# Altium PCB ip_phone_pcb.PcbDoc (part 1 of 4)
Units mil, origin at the board's own origin, x right, y up, seen from the top; angles counter-clockwise.
Board outline 2401.57 x 6885.83 mil, 6 copper layers (Component Side, Ground Plane, Inner Layer 1, Inner Layer 2, Power Plane, Solder Side), stack 60.4 mil thick; 371 components, 298 nets, 1249 pads, 735 vias.
Unrouted connection lines stored in the file: 81.
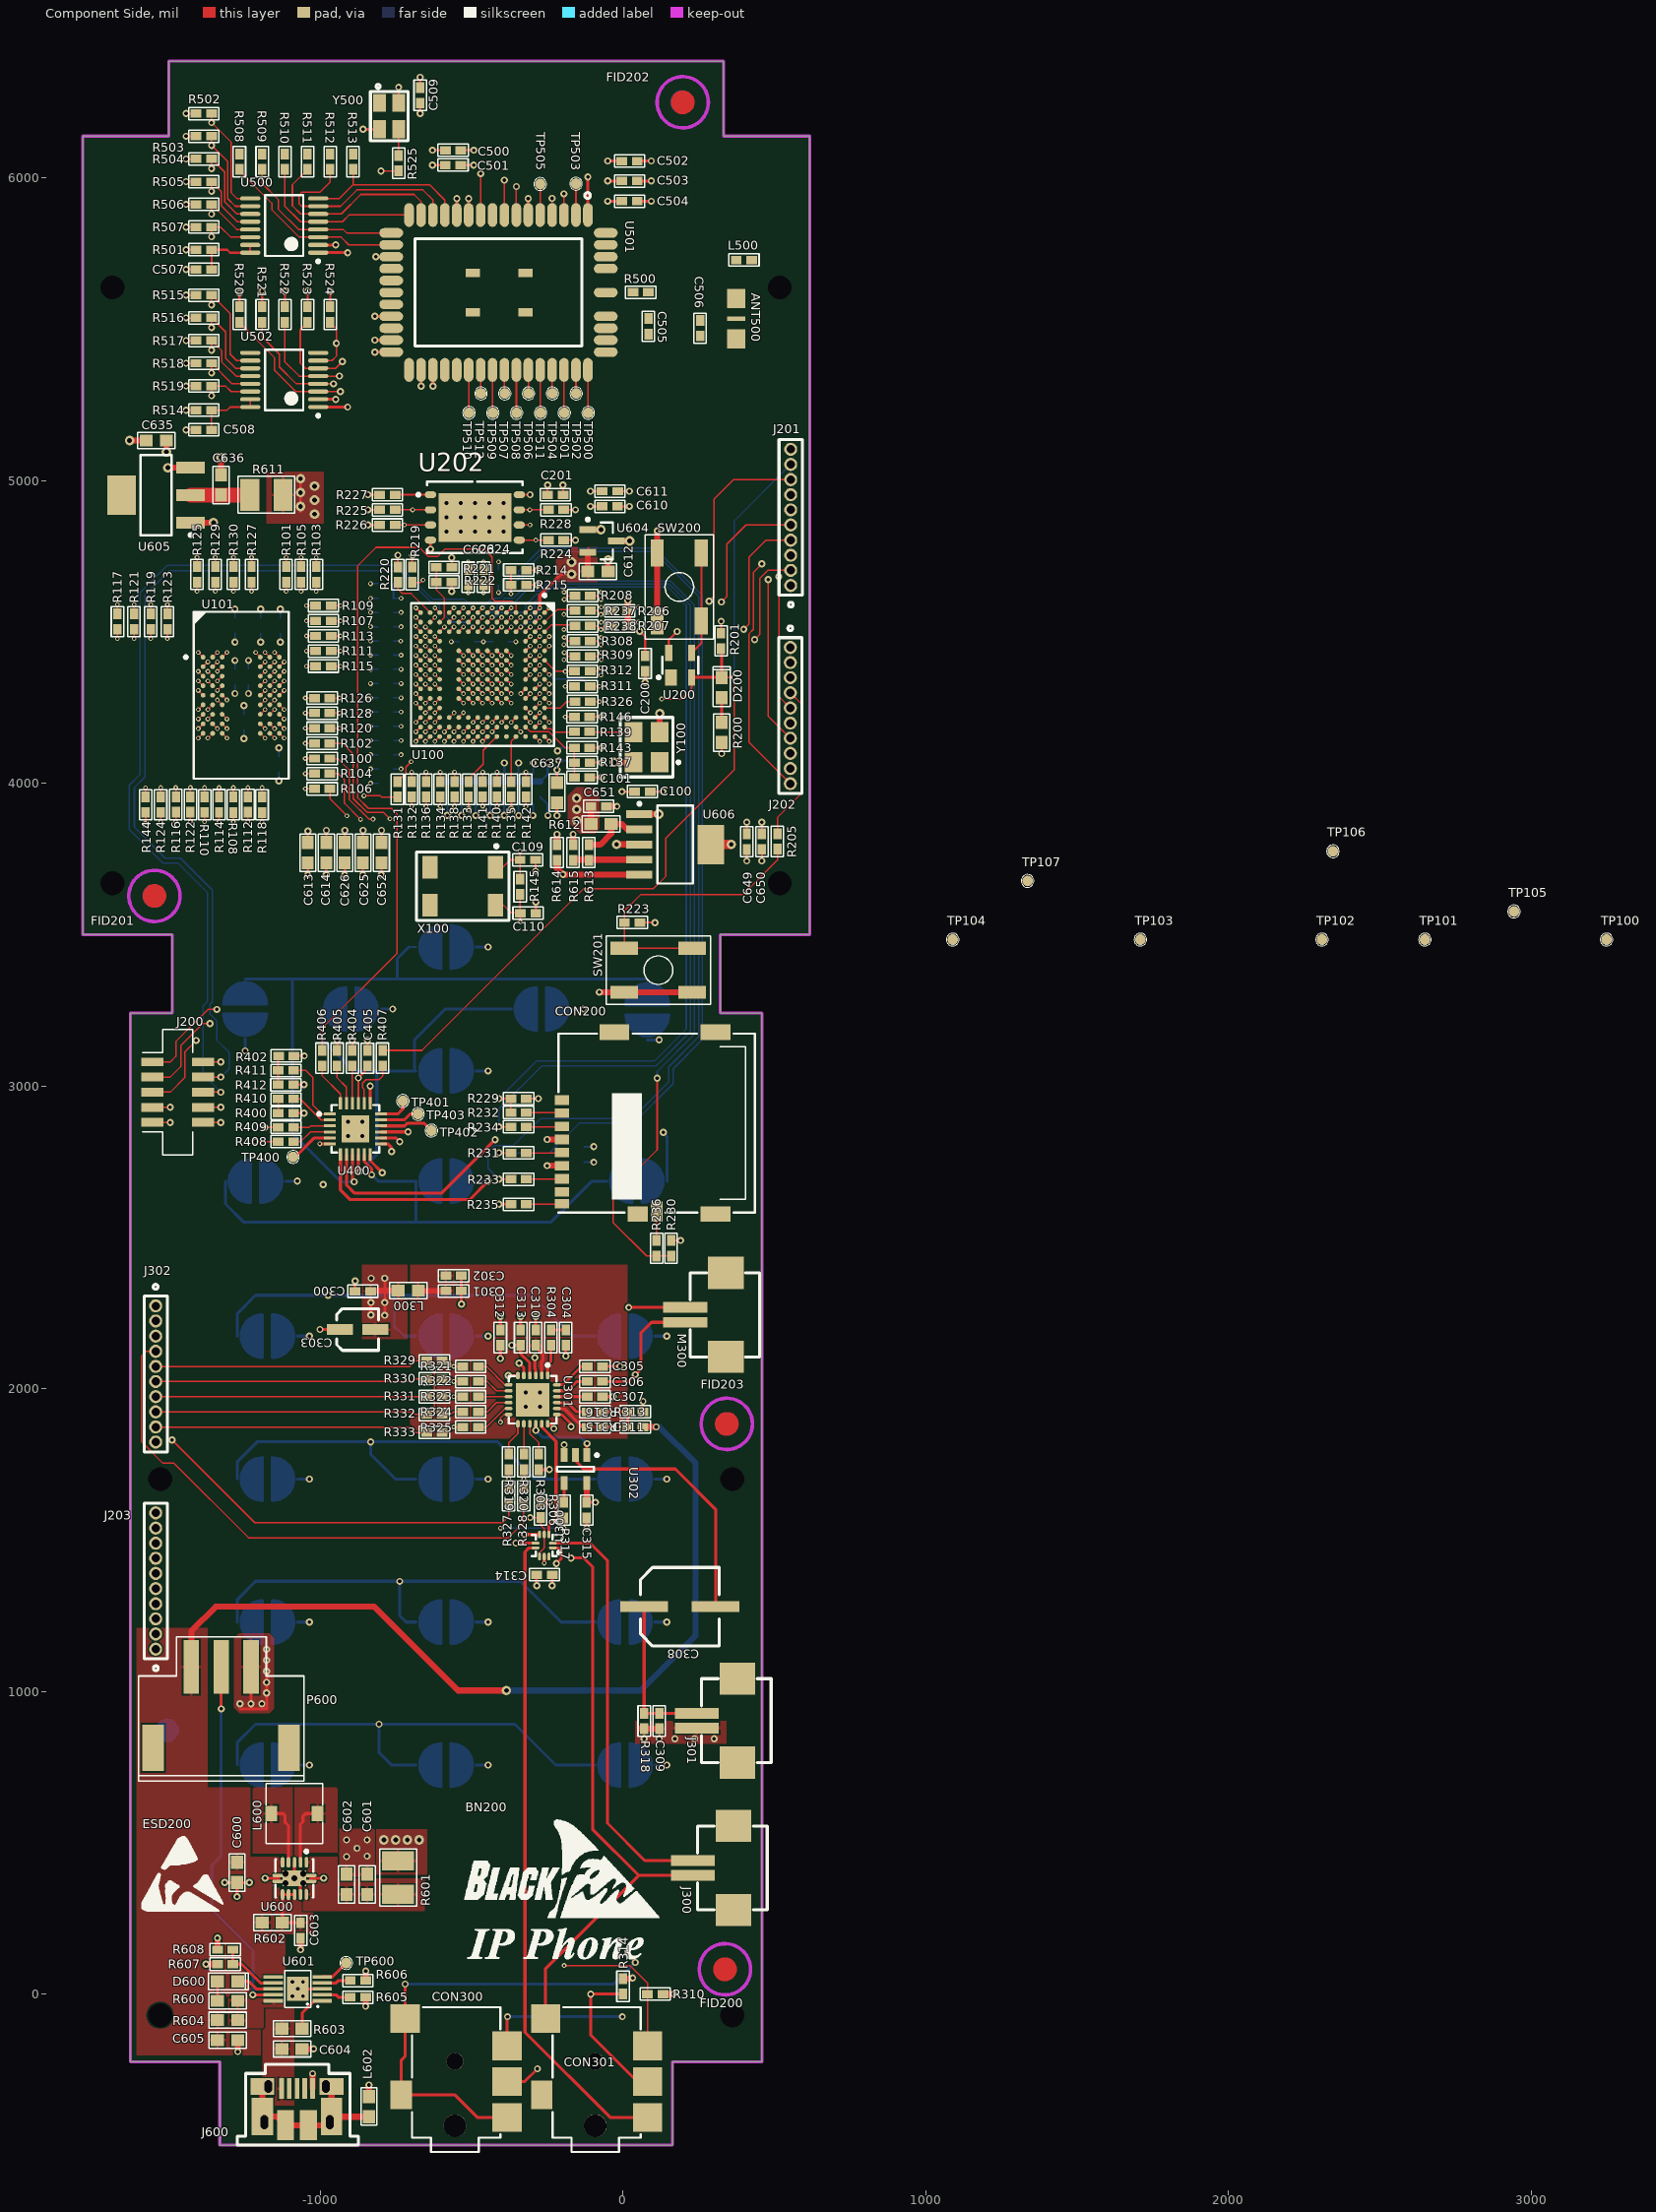
[diagram p0: Component Side view]
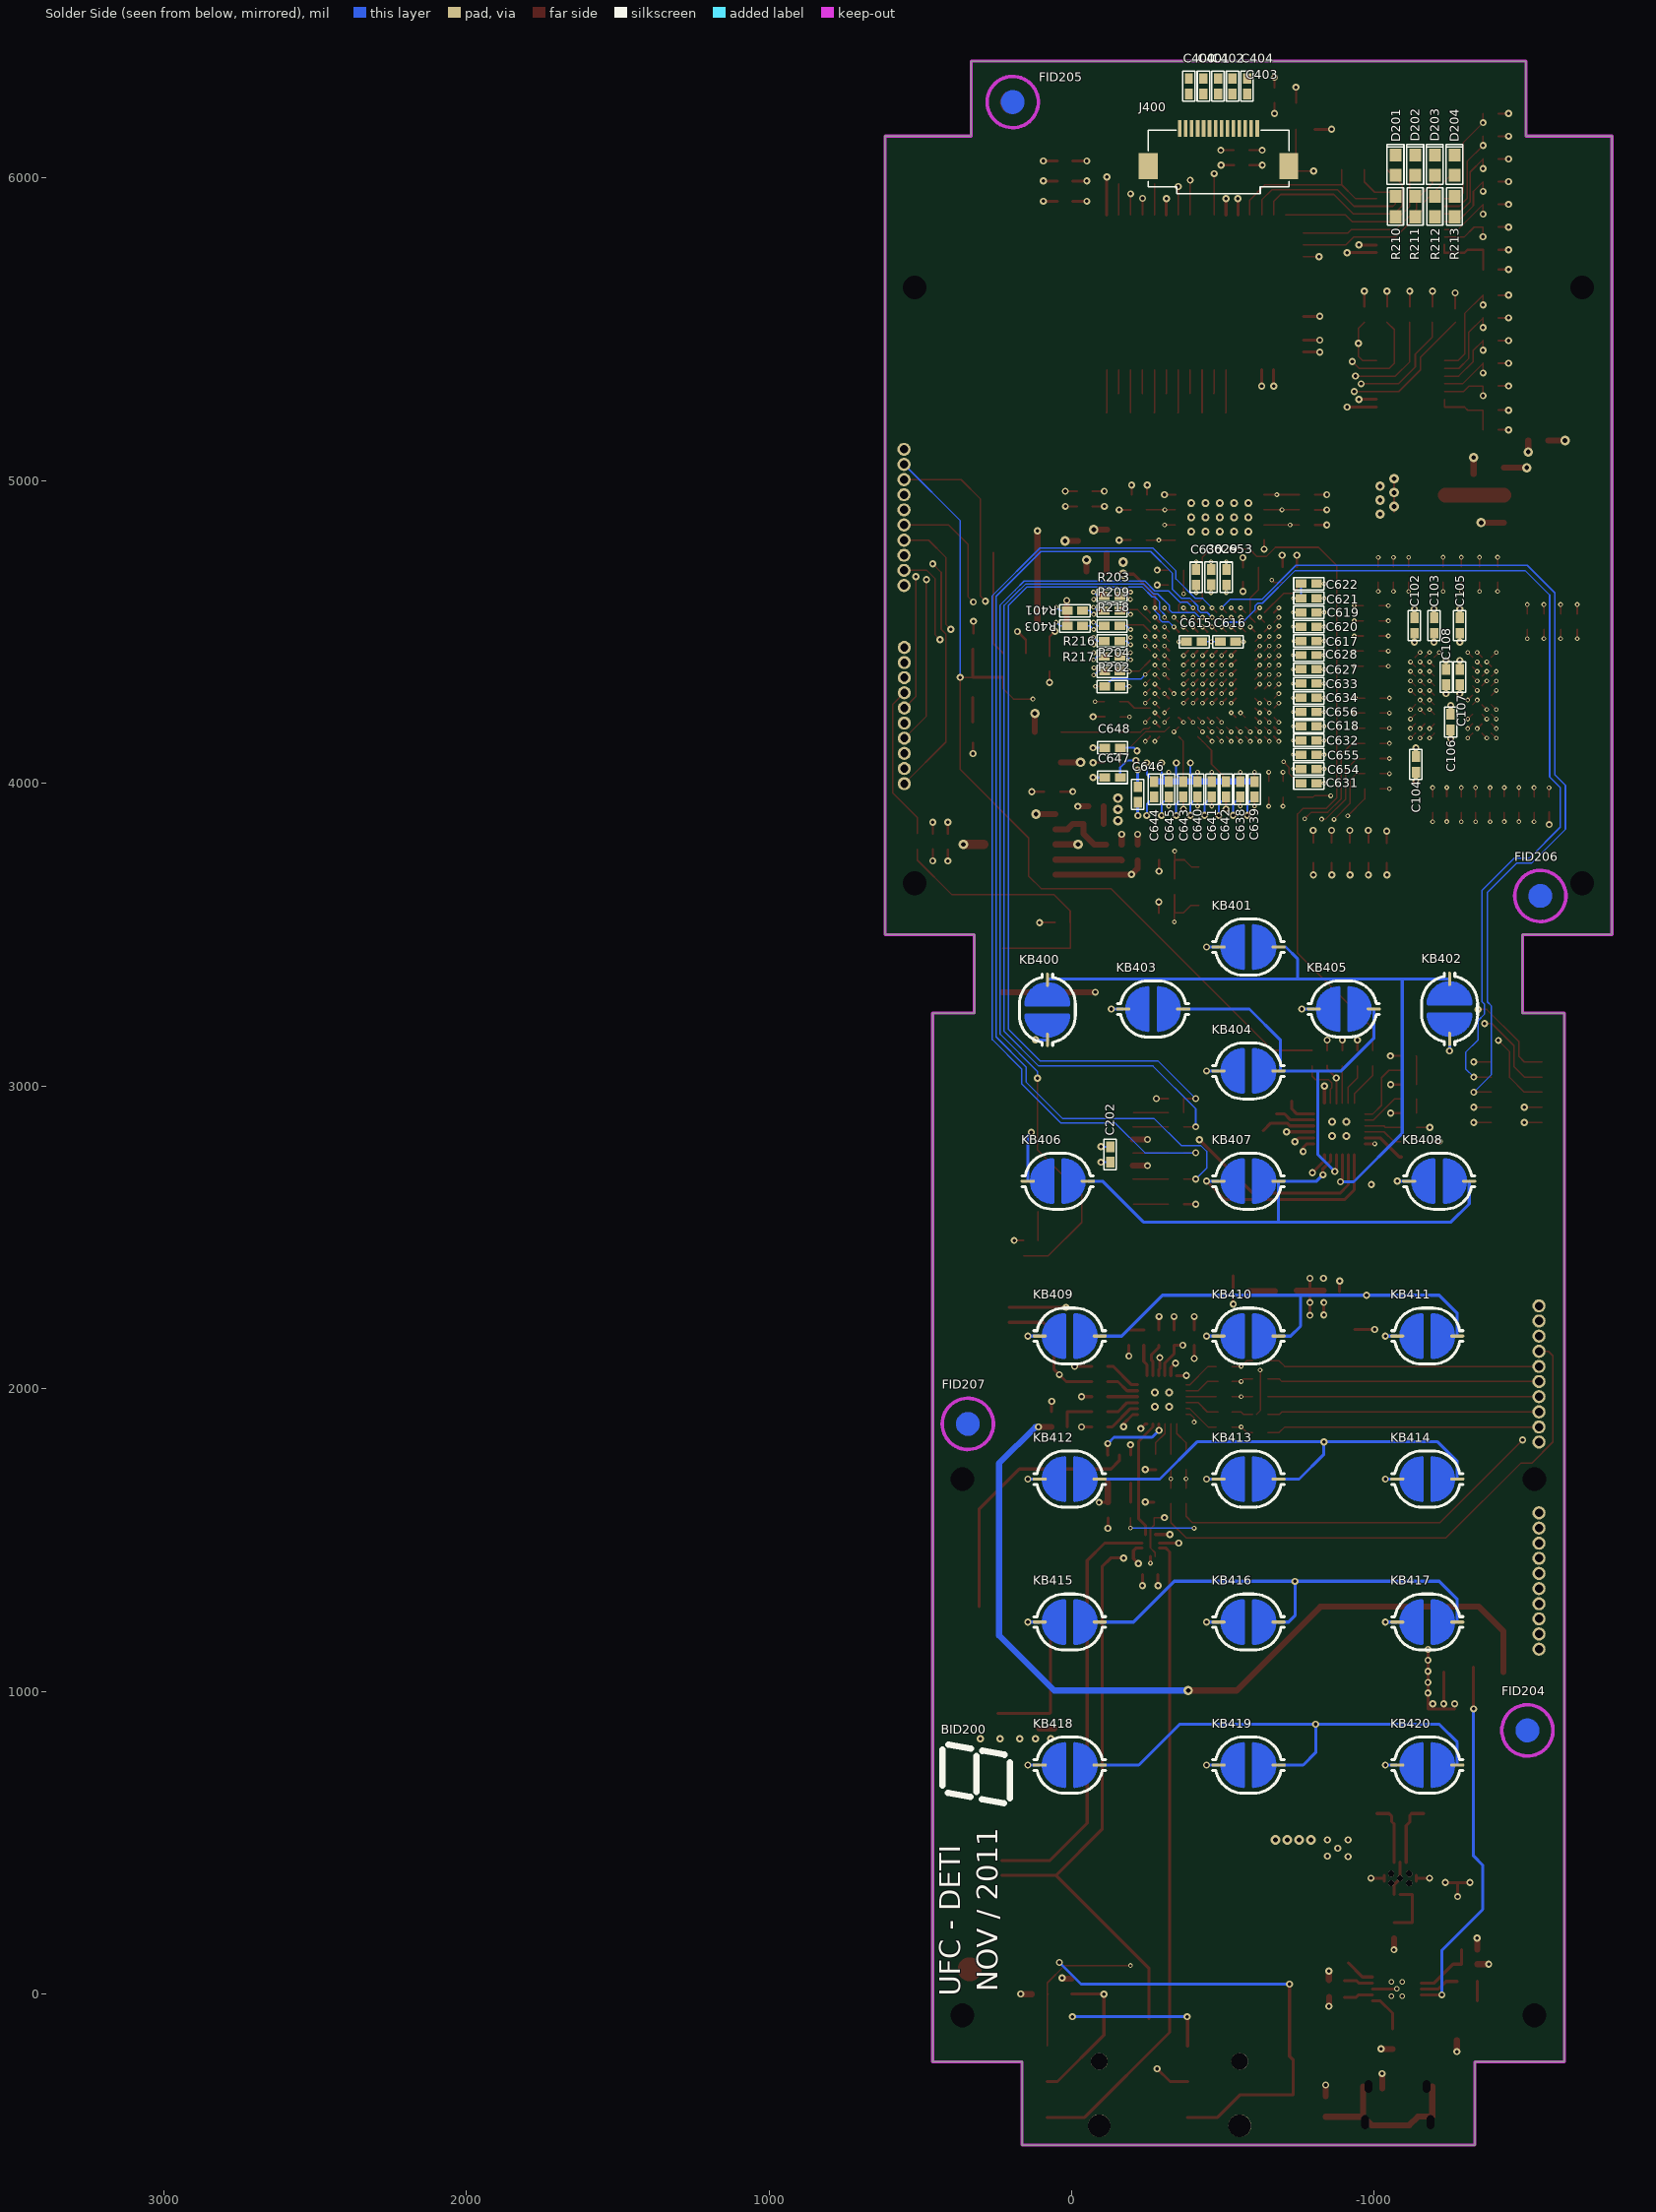
[diagram p1: Solder Side view, seen from below]
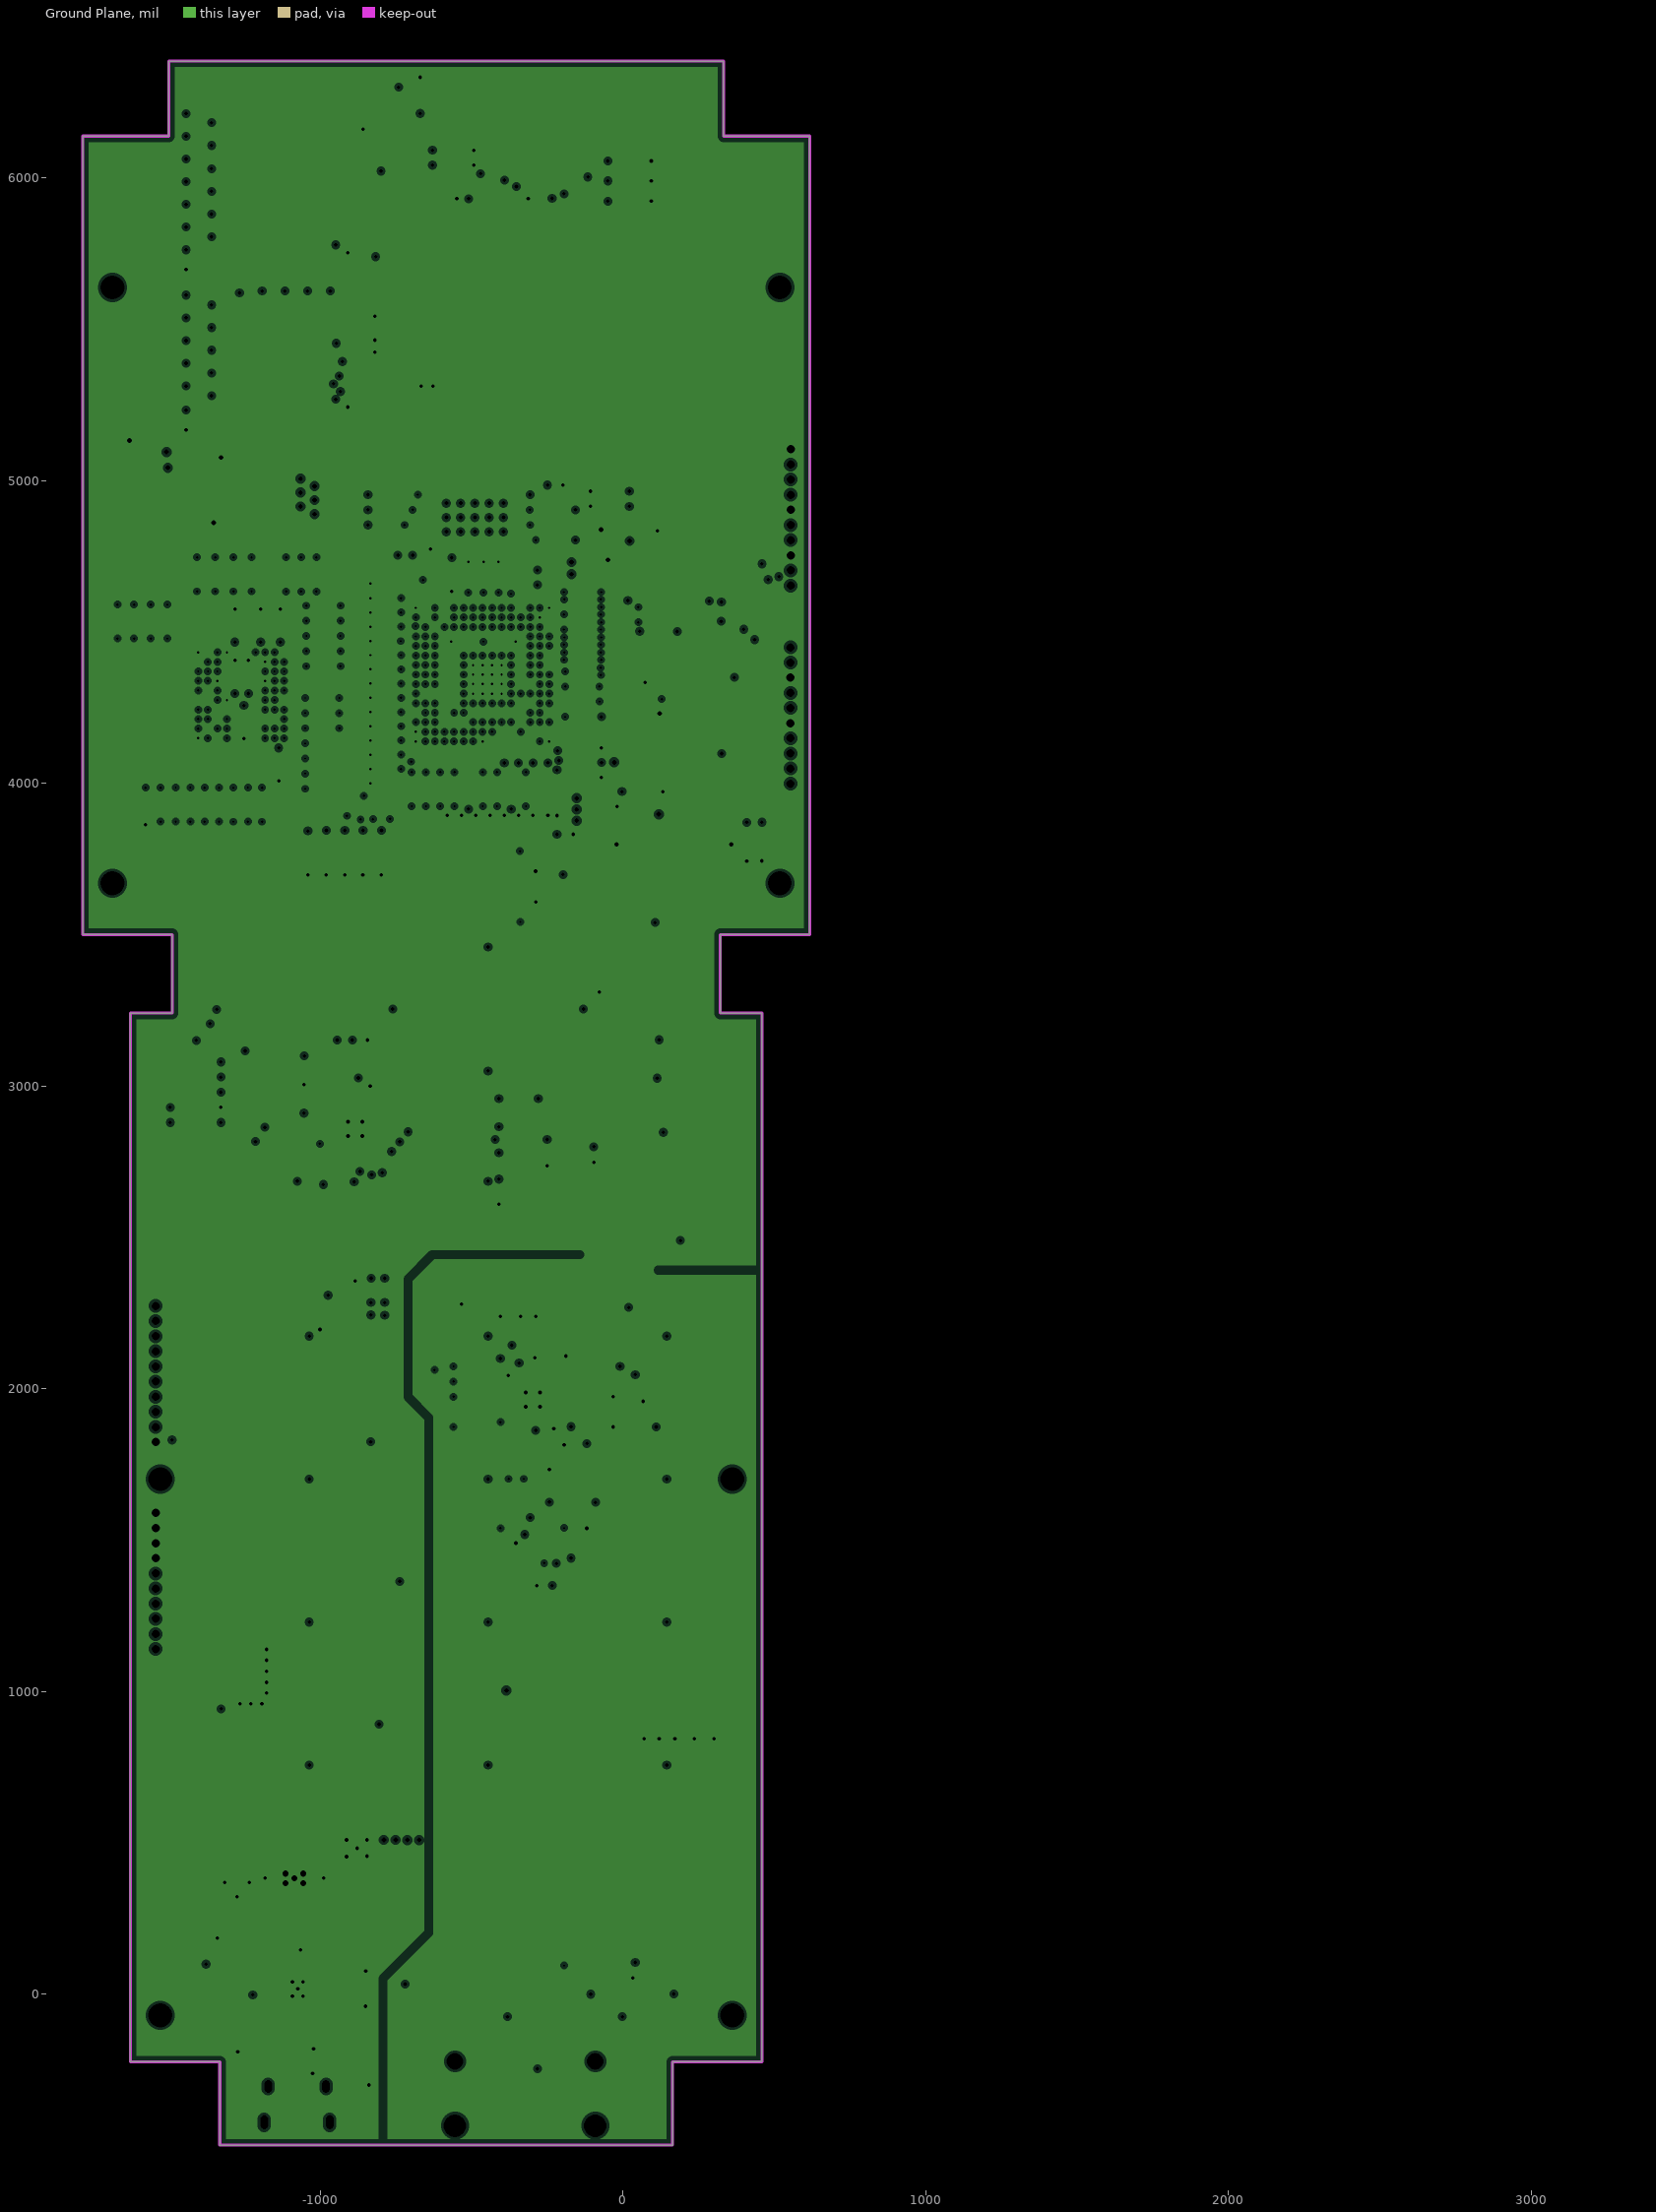
[diagram p2: Ground Plane, clearances drawn from the general rule]
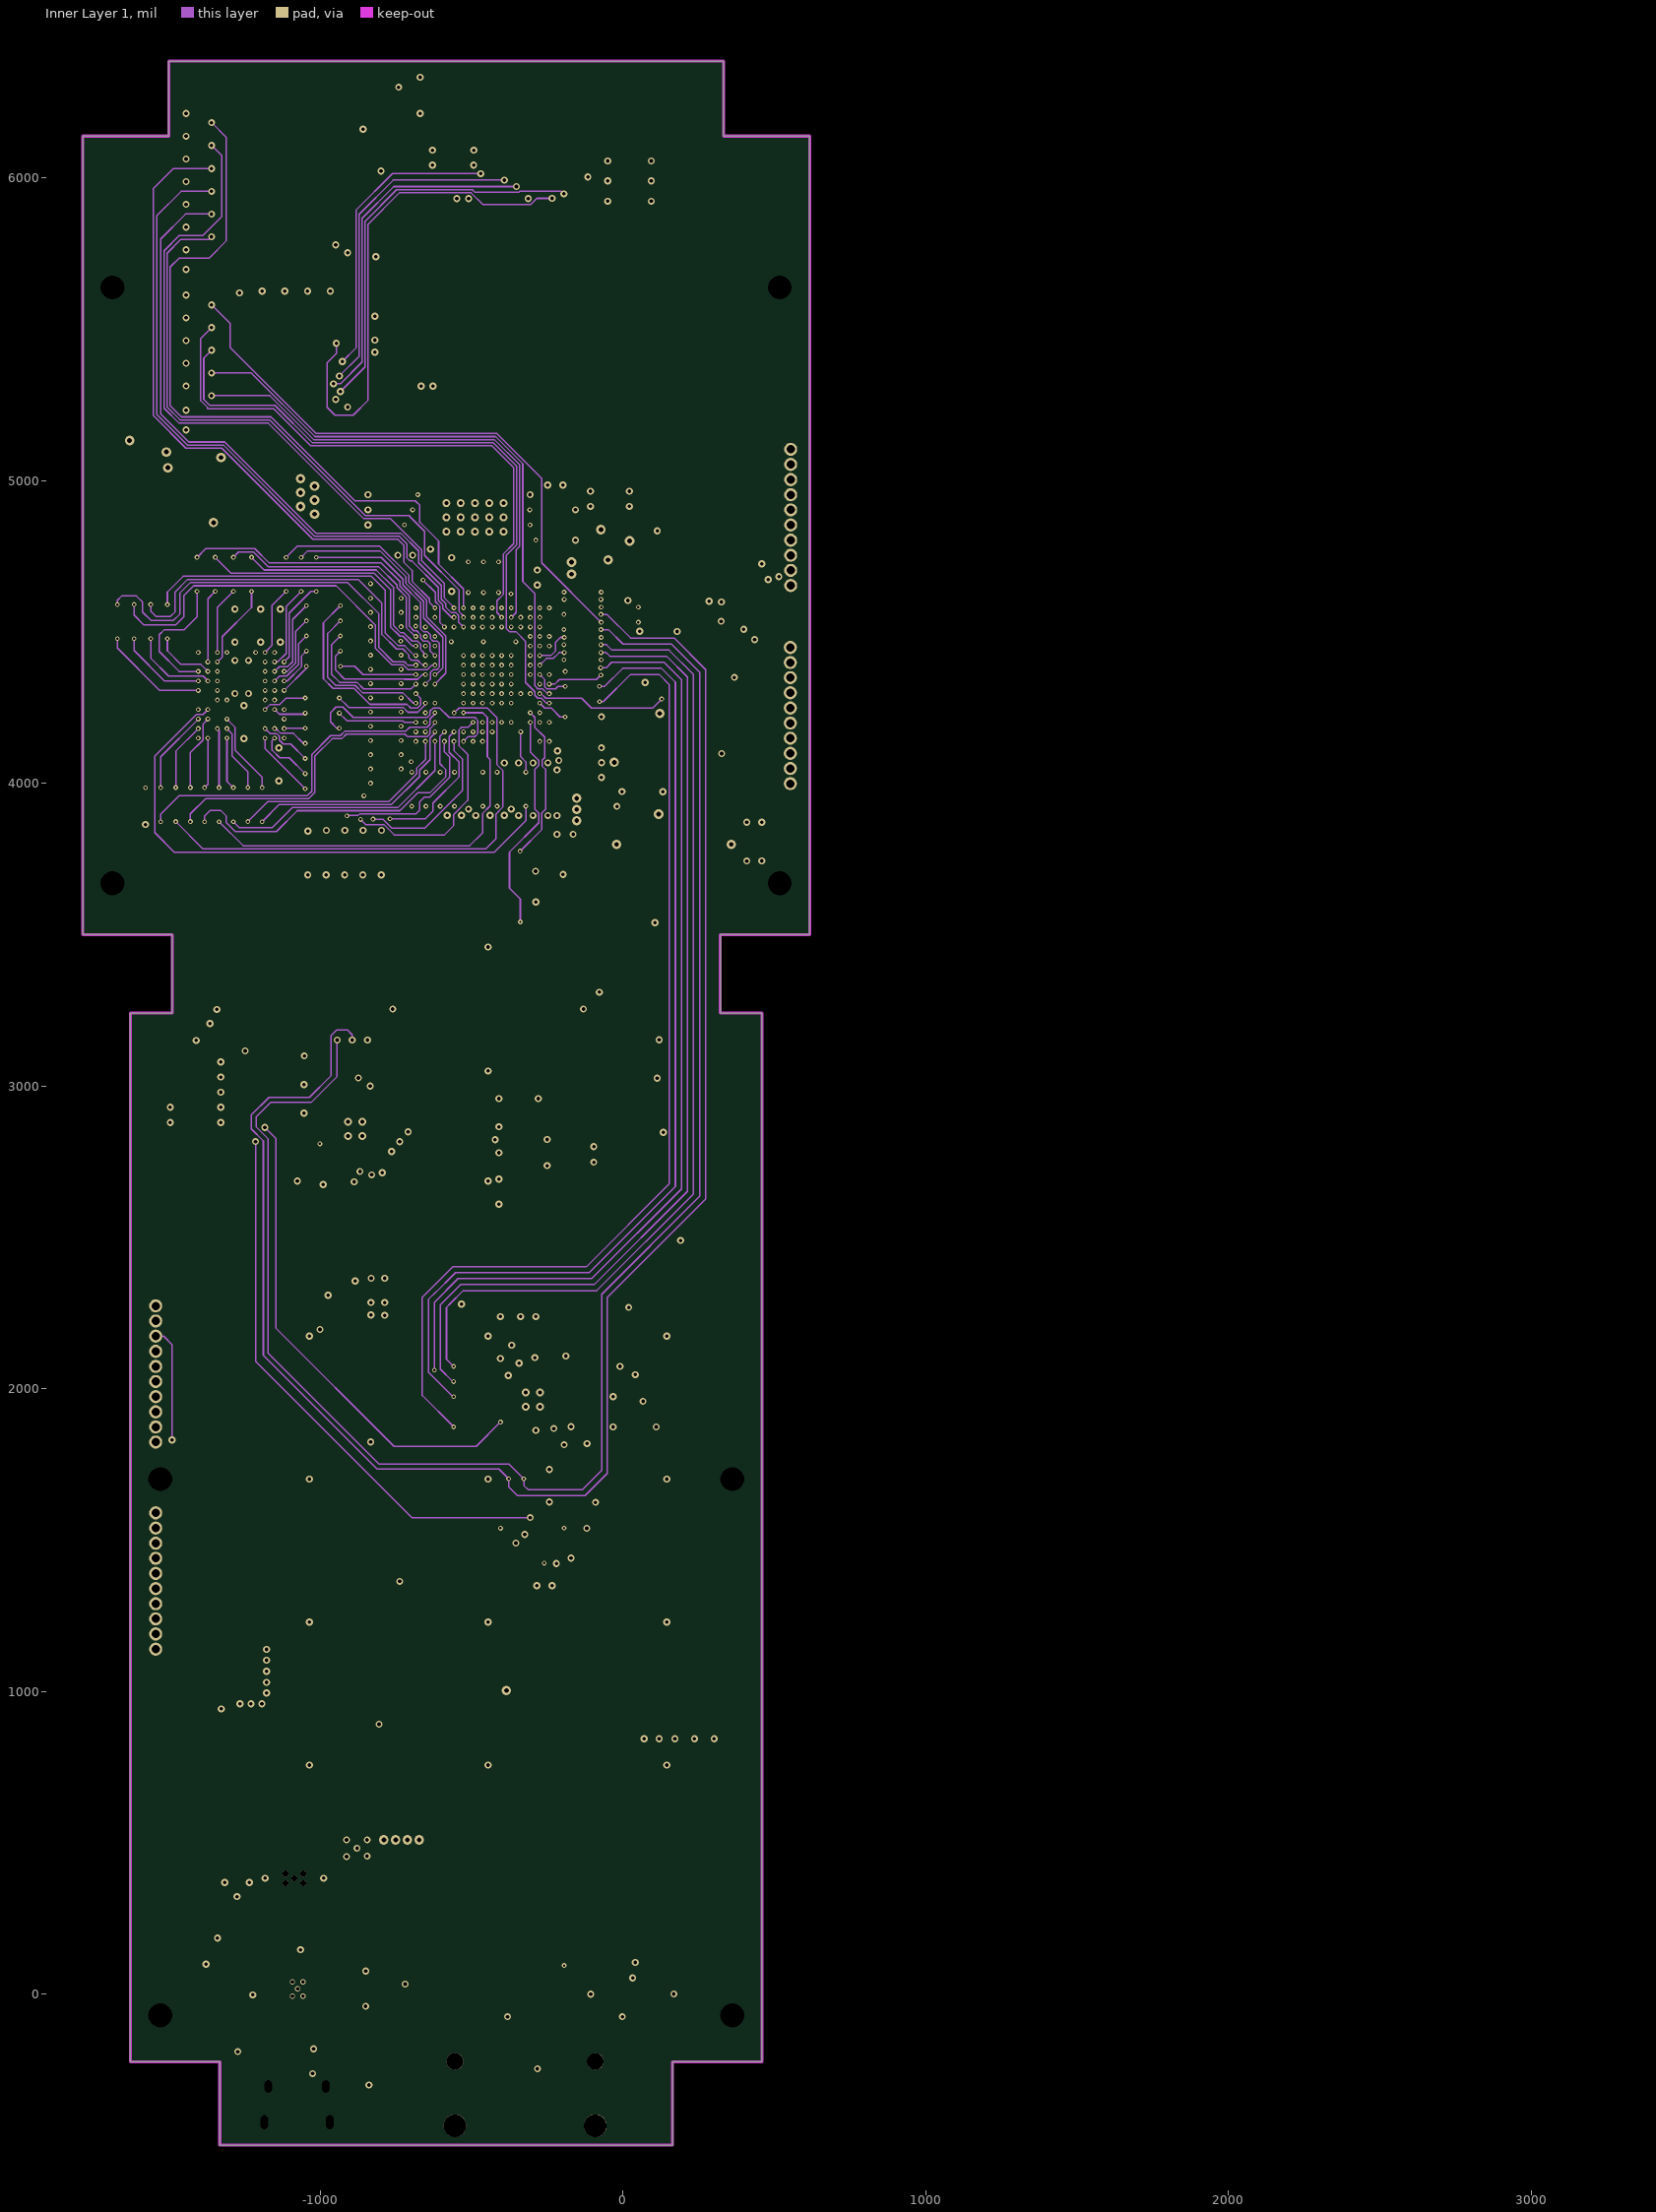
[diagram p3: Inner Layer 1]
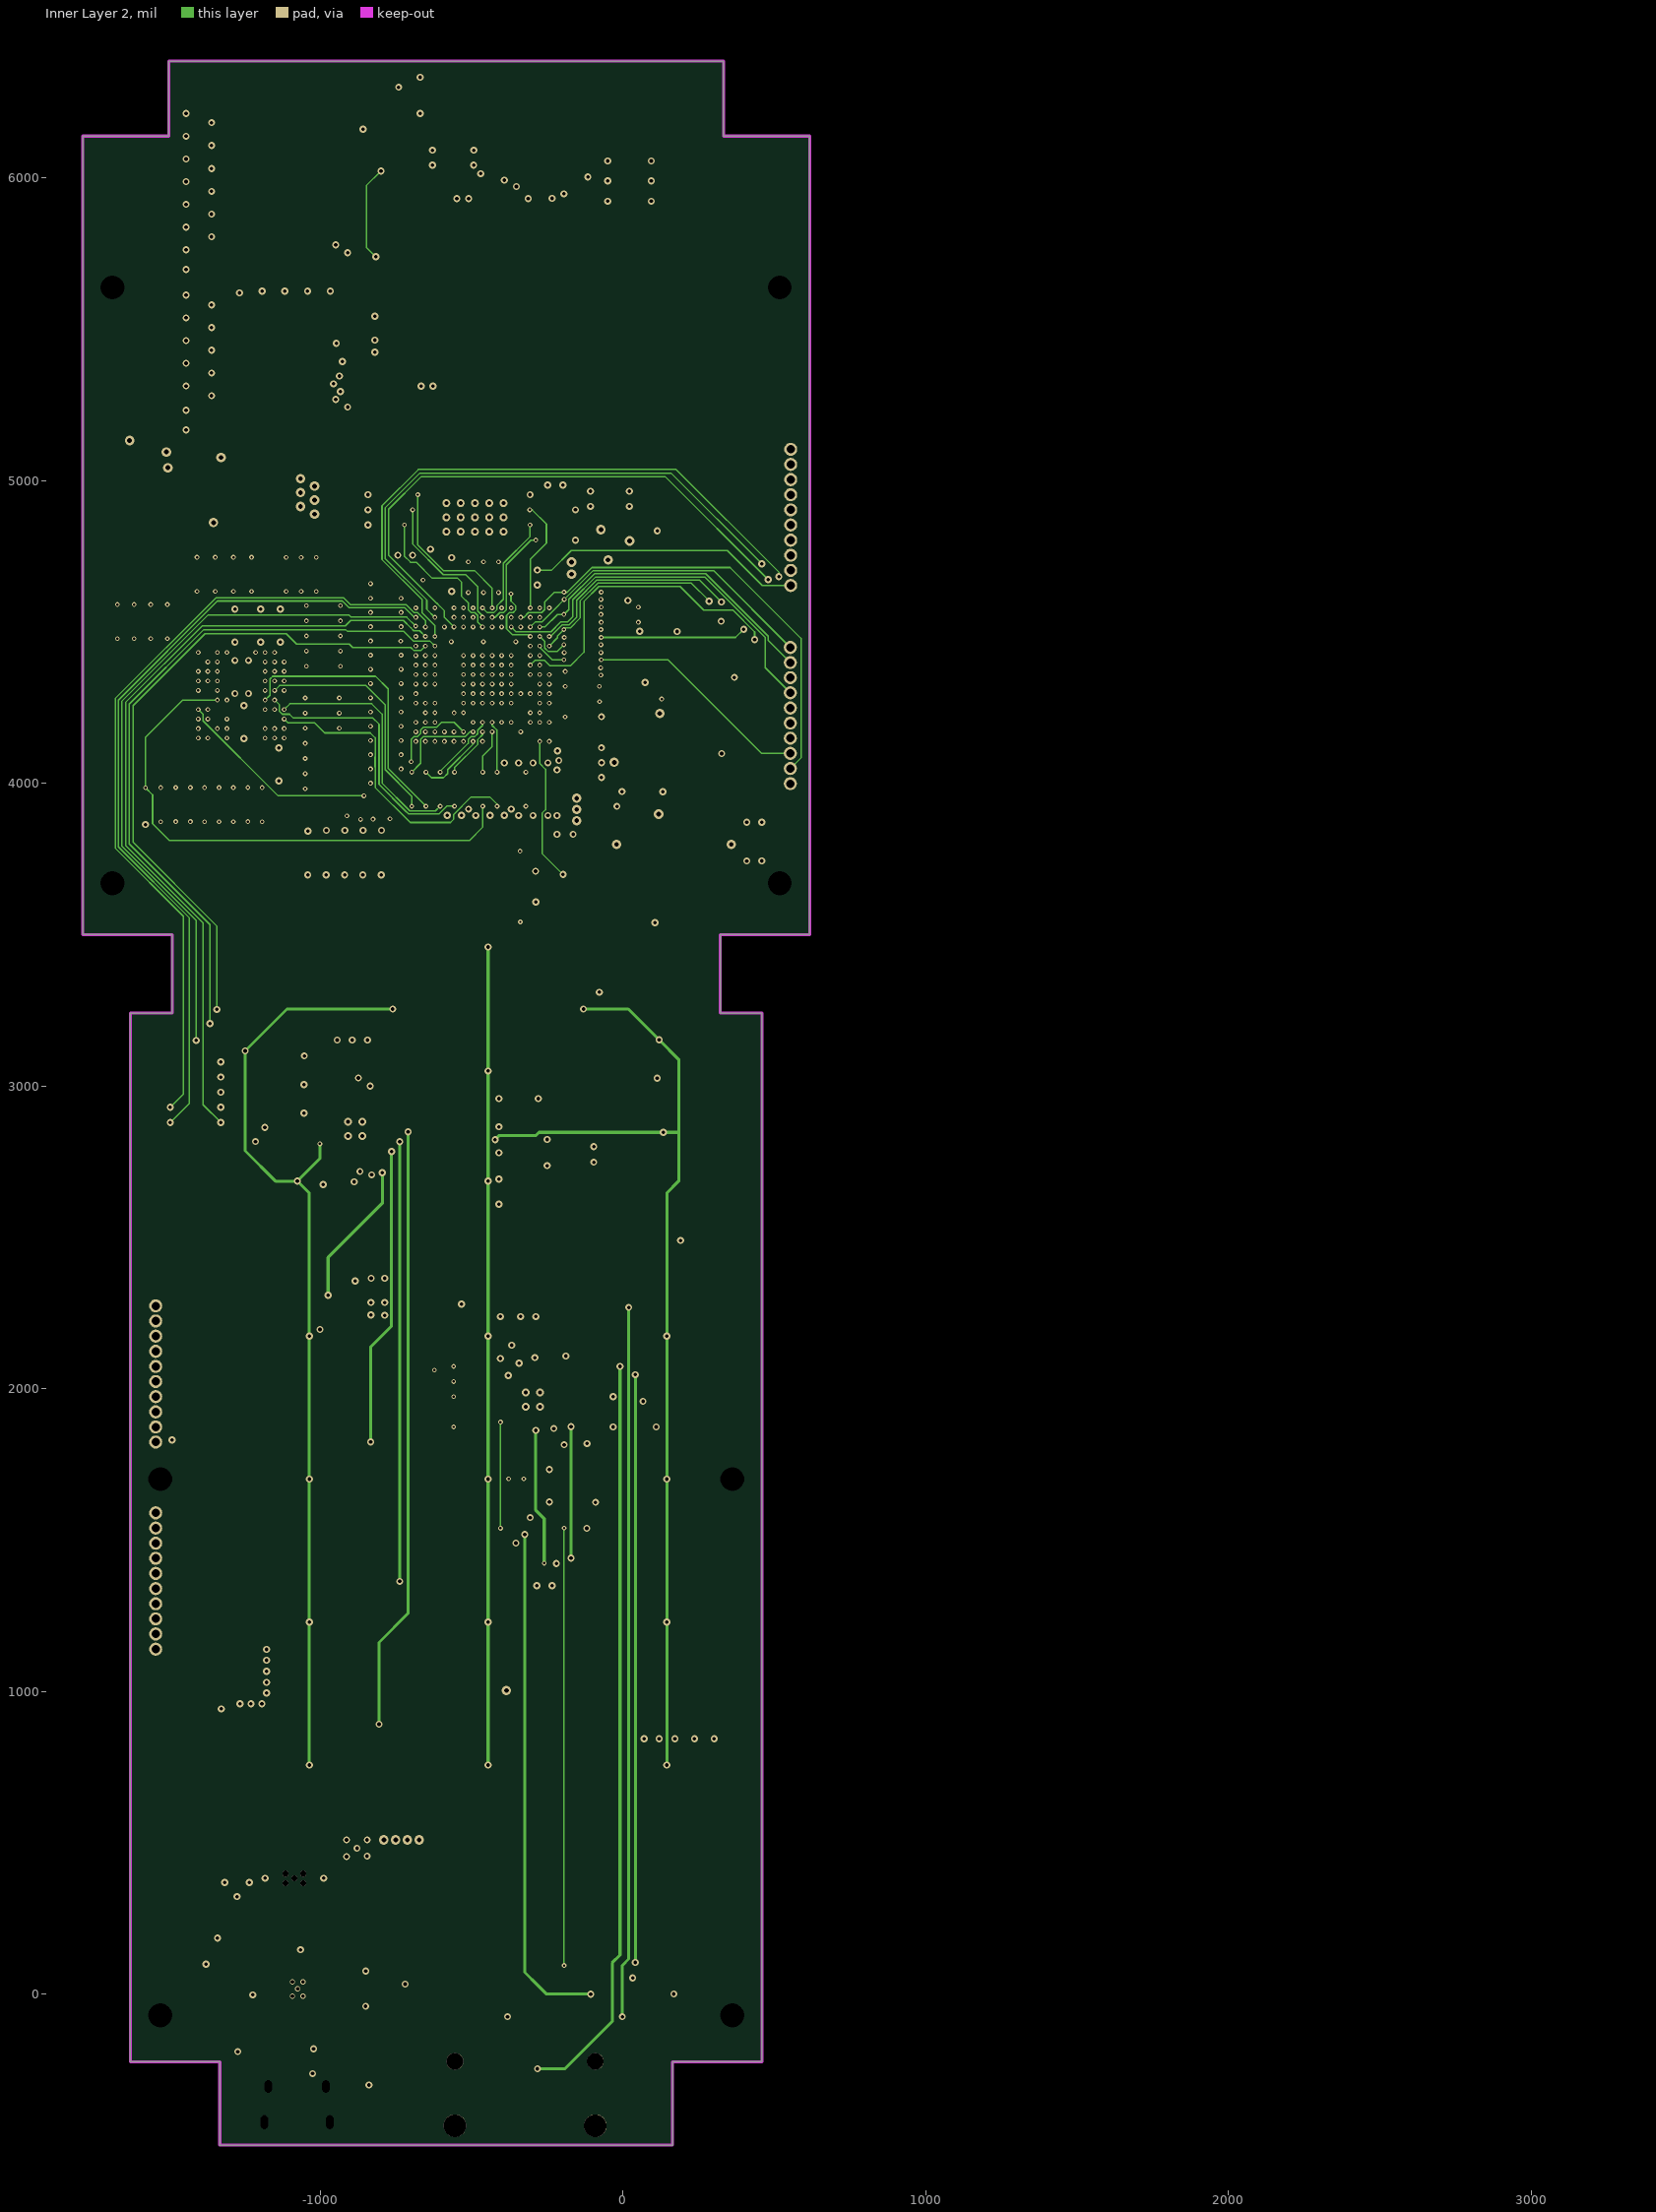
[diagram p4: Inner Layer 2]
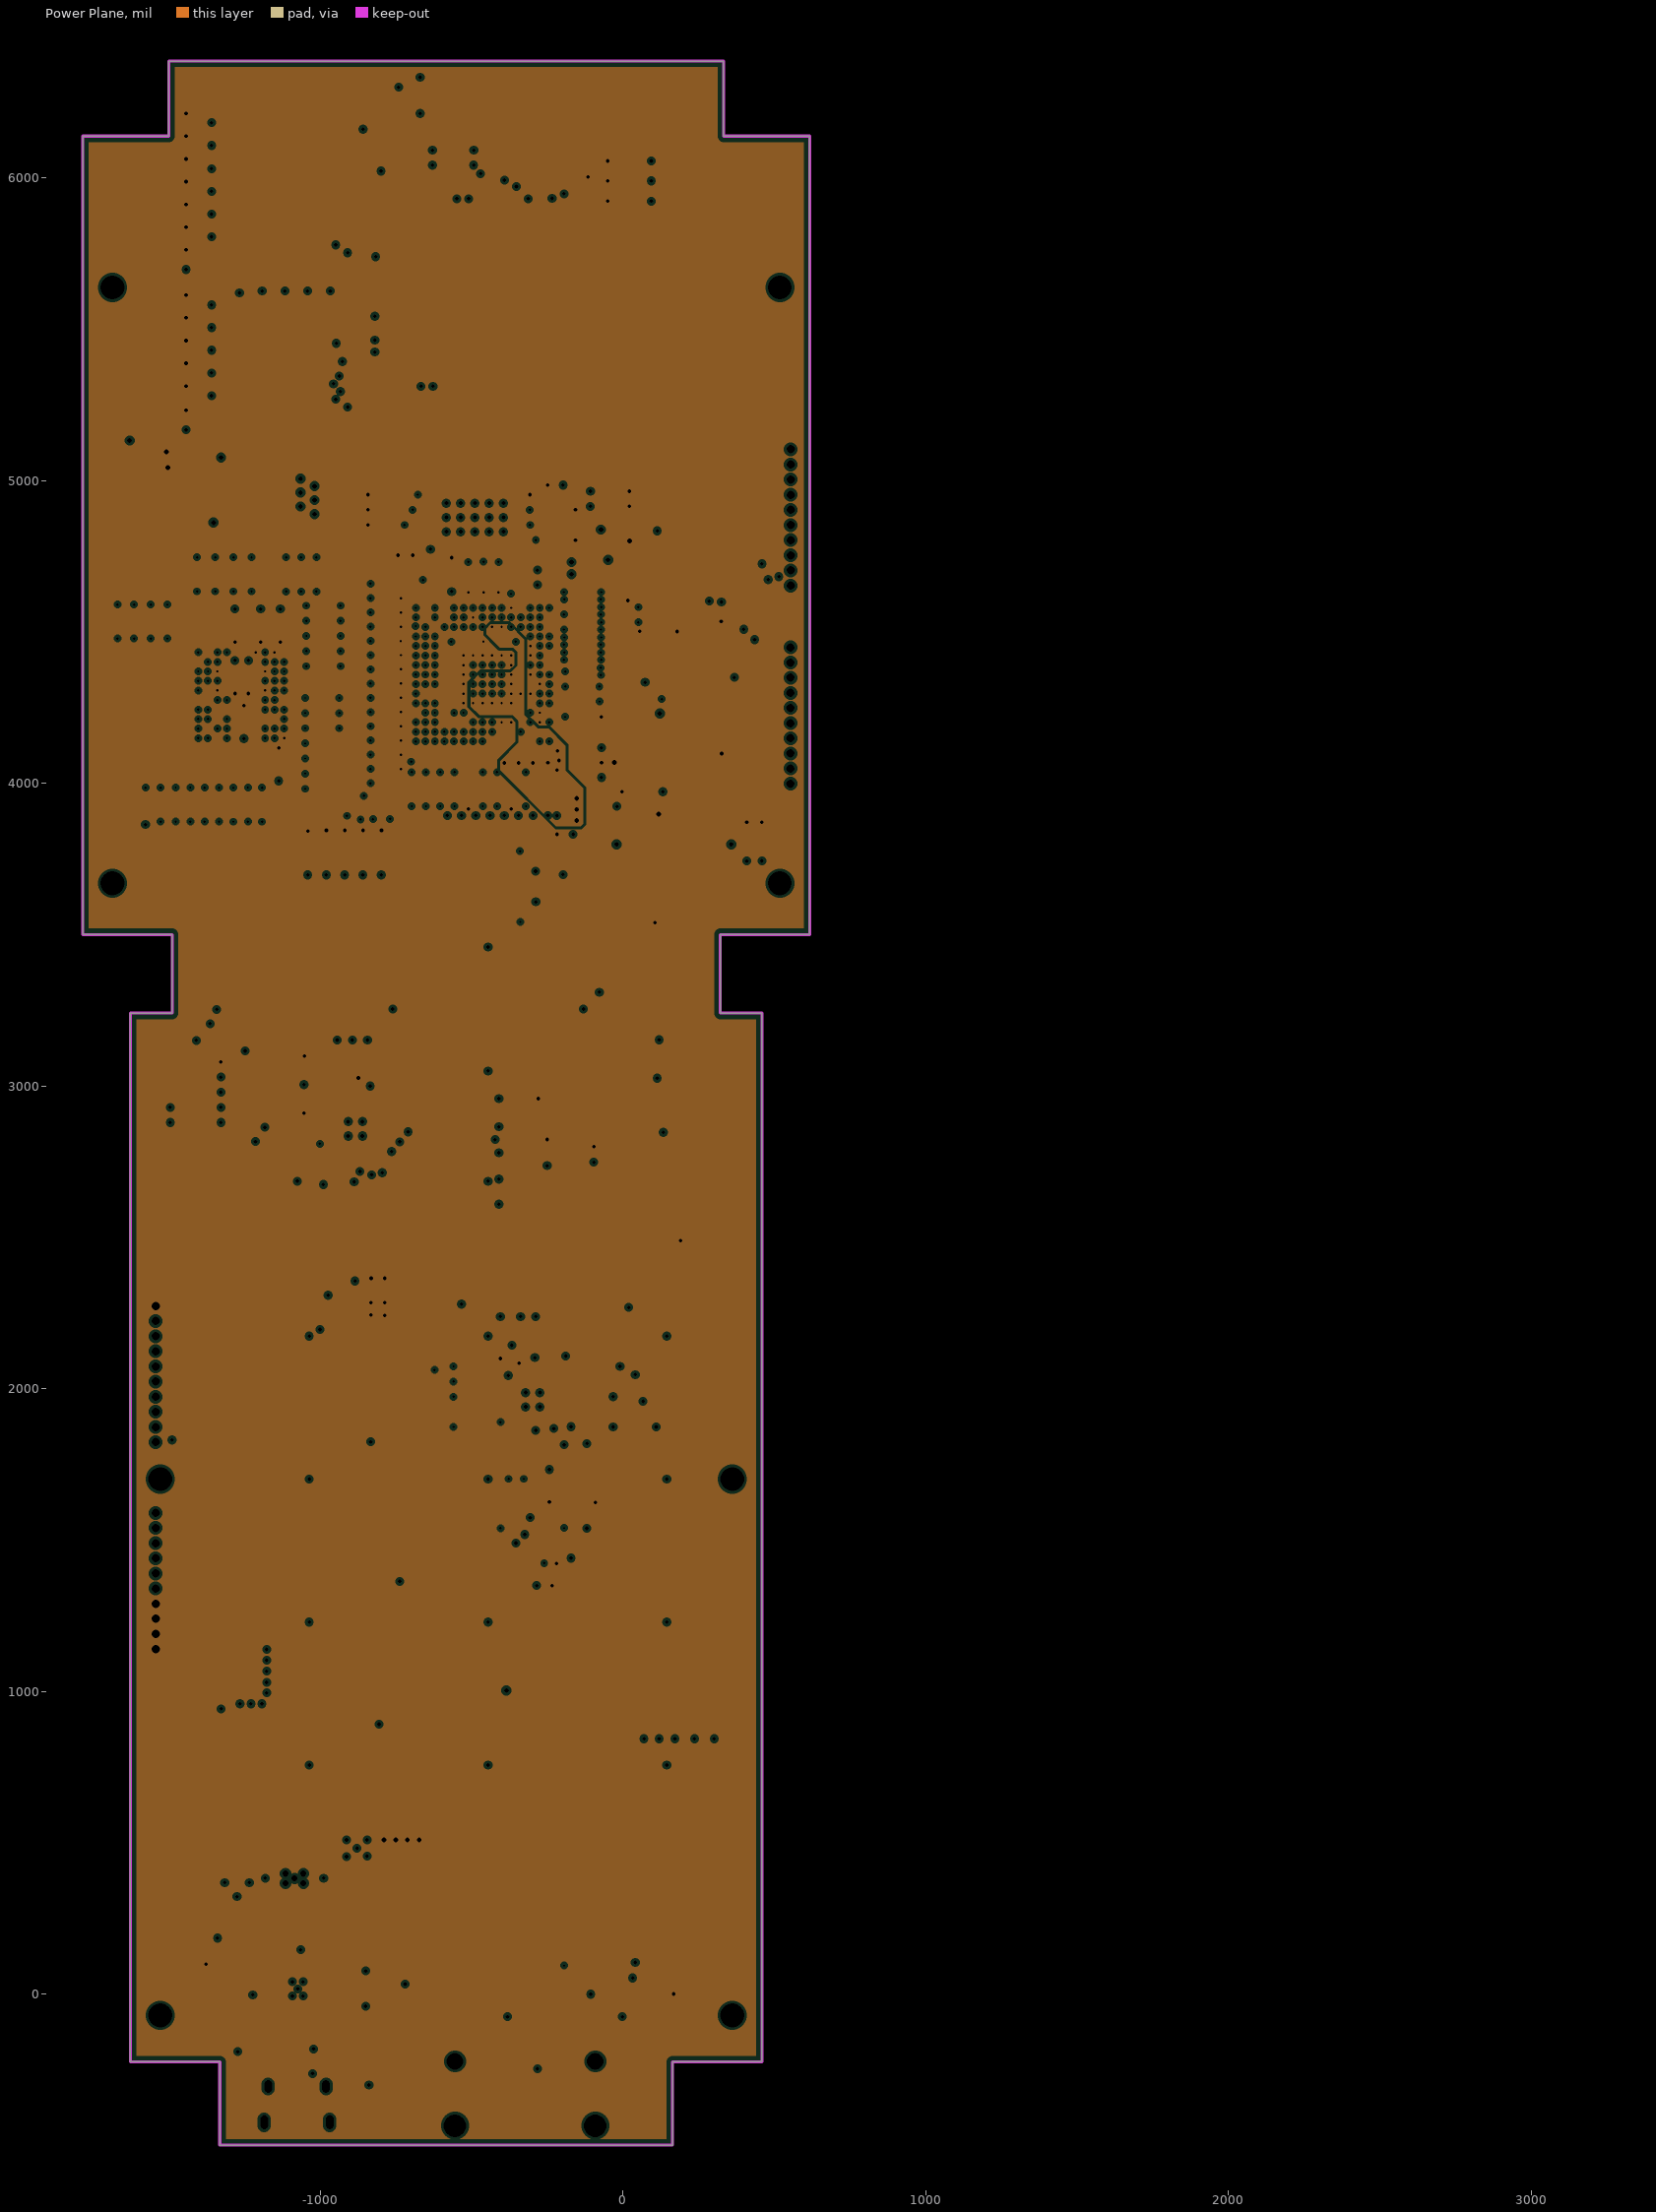
[diagram p5: Power Plane, clearances drawn from the general rule]
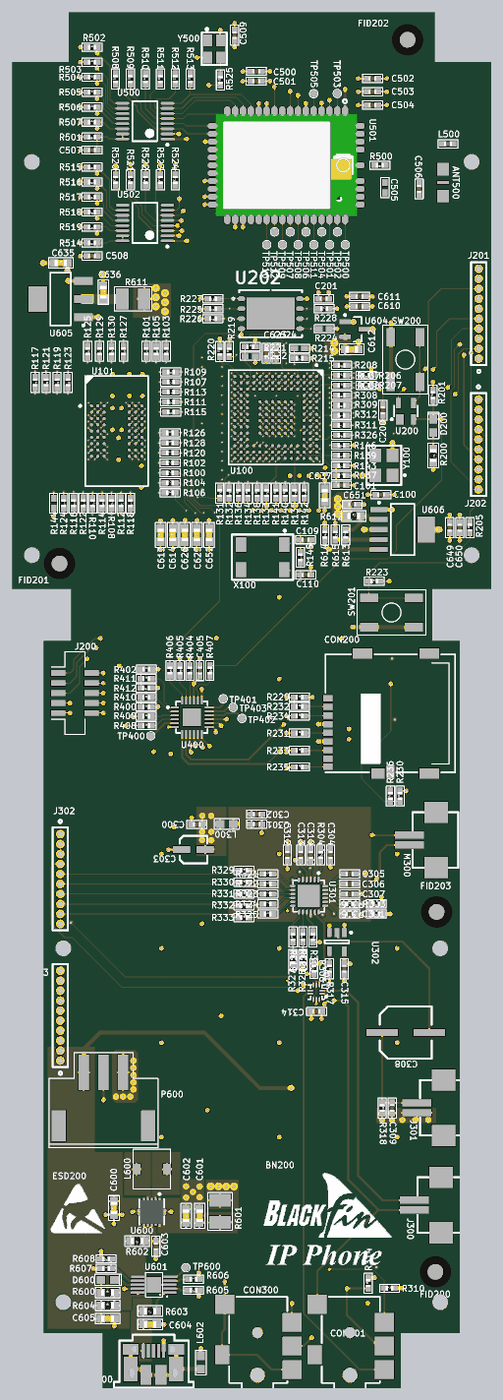
[diagram p9: 3D render of the assembled board from above, using the file's embedded part models]
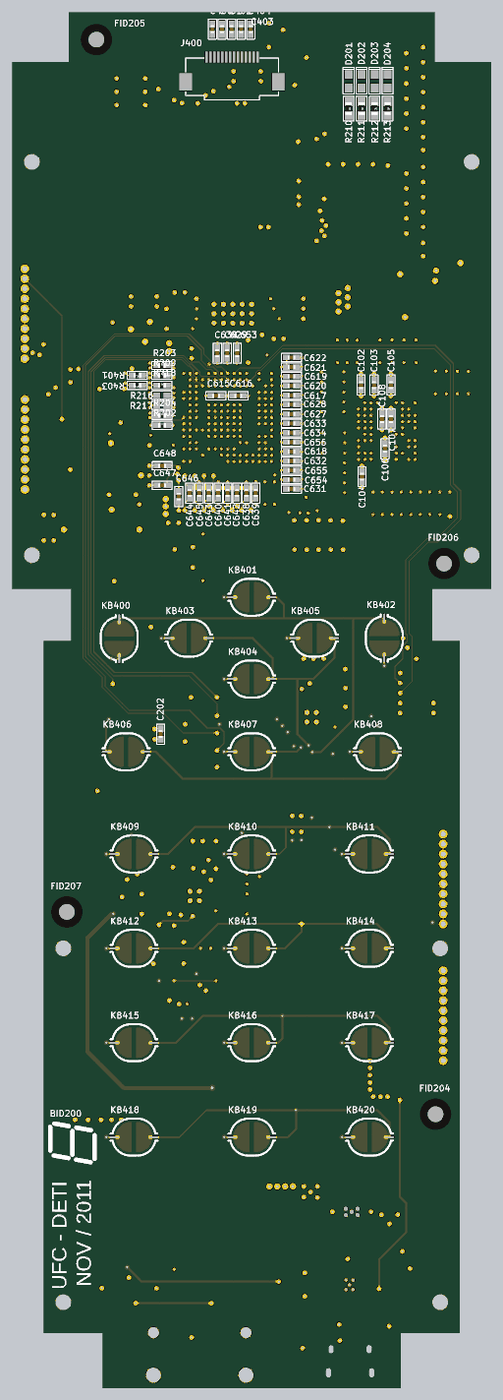
[diagram p10: 3D render of the assembled board from below, using the file's embedded part models]

## Layer stack, top to bottom
Component Side: signal copper 1.4
Dielectric: core 5, FR-4, Dk 4.8
Ground Plane: plane copper 1.4, net AGND
Dielectric: prepreg 3, FR-4, Dk 4.8
Inner Layer 1: signal copper 1.4
Dielectric: core 36, FR-4, Dk 4.8
Inner Layer 2: signal copper 1.4
Dielectric: prepreg 3, FR-4, Dk 4.8
Power Plane: plane copper 1.4, net (Multiple Nets)
Dielectric: core 5, FR-4, Dk 4.8
Solder Side: signal copper 1.4

## Board outline
-1627.28,3241.05 -1489.48,3241.05 -1489.48,3500.89 -1784.76,3500.89 -1784.76,6138.69 -1500.31,6138.69 -1500.31,6386.72 332.37,6386.72 332.37,6138.69 616.82,6138.69 616.82,3500.89 321.54,3500.89 321.54,3241.05 459.34,3241.05 459.34,-223.52 164.06,-223.52 164.06,-499.11 -1332,-499.11 -1332,-223.52 -1627.28,-223.52

## Design rules (kind name [scope] priority, off if disabled: settings)
Clearance [All] p1: gap=5
ComponentClearance [All] p1: gap=0 collisioncheckmode=3 verticalgap=0 showdistances=FALSE
DiffPairsRouting [All] p1: maxlimit=10 minlimit=4 mostfreqgap=5 maxuncoupledlength=500
FabricationTestpoint [All] p1: side=3 testpointundercomponent=TRUE minsize=0 maxsize=39.37 preferedsize=35.43 minholesize=0 maxholesize=196.85 preferedholesize=0 testpointgrid=1 allowsidetop=TRUE allowsidebottom=TRUE usegrid=FALSE gridtolerance=0.01
PlaneClearance [All] p1: clearance=9
PlaneConnect [All] p1: planeconnectstyle=Direct reliefexpansion=20 reliefentries=4 reliefconductorwidth=10 reliefairgap=10
PolygonConnect Polygon_via [All vs isvia] p1: connectstyle=Direct reliefconductorwidth=10 reliefentries=4 polygonreliefangle="90 Angle"
PolygonConnect [All] p2: connectstyle=Relief reliefconductorwidth=10 reliefentries=4 polygonreliefangle="90 Angle"
RoutingVias [All] p1: holewidth=11.81 width=23.62 viastyle="Through Hole" minholewidth=7.87 minwidth=15.75 maxholewidth=28 maxwidth=50
ShortCircuit ShortCircuit_WSON8 [(HasFootprint('WSON8'))] p1: allowed=TRUE
ShortCircuit [All] p2: allowed=FALSE
SilkToSilkClearance [All] p1: silktosilkclearance=0
SilkscreenOverComponentPads [All] p1: minsilkscreentomaskgap=0
SolderMaskExpansion [All] p1: expansion=4
Width [All] p1: maxlimit=100 minlimit=4 preferedwidth=10
20 further rules are at their usual default settings.

## Classes and differential pairs
net class D[0..15]: D0 D1 D2 D3 D4 D5 D6 D7 D8 D9 D10 D11 D12 D13 D14 D15
net class A[0..12]: A0 A1 A2 A3 A4 A5 A6 A7 A8 A9 A10 A11 A12
component class ip_phone_f_power: C600 C601 C602 C603 C604 C605 C610 C611 C612 C613 C614 C615 C616 C617 C618 C619 C620 C621 C622 C623 C624 C625 C626 C627 C628 C629 C630 C631 C632 C633 C634 C635 C636 C637 C638 C639 C640 C641 C642 C643 C644 C645 C646 C647 C648 C649 C650 C651 C652 C653 C654 C655 C656 D600 J600 L600 L602 P600 R600 R601 R602 R603 R604 R605 R606 R607 R608 R611 R612 R613 R614 R615 TP600 U600 U601 U604 U605 U606
component class ip_phone_e_wifi: ANT500 C500 C501 C502 C503 C504 C505 C506 C507 C508 C509 L500 R500 R501 R502 R503 R504 R505 R506 R507 R508 R509 R510 R511 R512 R513 R514 R515 R516 R517 R518 R519 R520 R521 R522 R523 R524 R525 TP500 TP501 TP502 TP503 TP504 TP505 TP506 TP507 TP508 TP509 TP510 TP511 TP512 U500 U501 U502 Y500
component class ip_phone_d_lcd_keyboard: C400 C401 C402 C403 C404 C405 J400 KB400 KB401 KB402 KB403 KB404 KB405 KB406 KB407 KB408 KB409 KB410 KB411 KB412 KB413 KB414 KB415 KB416 KB417 KB418 KB419 KB420 LCD400 R400 R401 R402 R403 R404 R405 R406 R407 R408 R409 R410 R411 R412 TP400 TP401 TP402 TP403 U400
component class ip_phone_c_codec: C300 C301 C302 C303 C304 C305 C306 C307 C308 C309 C310 C311 C312 C313 C314 C315 CON300 CON301 CR300 CR301 CR302 CR303 CR304 CR305 J300 J301 J302 L300 M300 P300 P301 P302 R303 R304 R306 R308 R309 R310 R311 R312 R313 R314 R315 R316 R317 R318 R319 R320 R321 R322 R323 R324 R325 R326 R327 R328 R329 R330 R331 R332 R333 S300 S301 U300 U301 U302
component class ip_phone_b_miscellaneous: B200 BID200 BN200 C200 C201 C202 CON200 D200 D201 D202 D203 D204 ESD200 FC200 FID200 FID201 FID202 FID203 FID204 FID205 FID206 FID207 J200 J201 J202 J203 R200 R201 R202 R203 R204 R205 R206 R207 R208 R209 R210 R211 R212 R213 R214 R215 R216 R217 R218 R219 R220 R221 R222 R223 R224 R225 R226 R227 R228 R229 R230 R231 R232 R233 R234 R235 R236 R237 R238 SW200 SW201 U200 U202
component class ip_phone_a_sdram: C100 C101 C102 C103 C104 C105 C106 C107 C108 C109 C110 R100 R101 R102 R103 R104 R105 R106 R107 R108 R109 R110 R111 R112 R113 R114 R115 R116 R117 R118 R119 R120 R121 R122 R123 R124 R125 R126 R127 R128 R129 R130 R131 R132 R133 R134 R135 R136 R137 R138 R139 R140 R141 R142 R143 R144 R145 R146 TP100 TP101 TP102 TP103 TP104 TP105 TP106 TP107 U100 U101 X100 Y100

## Components (designator, comment, footprint, x,y, rotation, side; value= is the part's Value field where it differs from the comment)
ANT500 "Chip_Antenna_2.4GHz" ANTENNA 374.09,5468.52 r0 top
BID200 "Board_ID" BOARD_ID 203.96,648.06 r90 bottom
BN200 "Board_Name" LOGO -190.02,304 r0 top
C100 "10nF" CC1005-0402 89.64,3972.85 r180 top
C101 "220pF" CC1005-0402 -109.18,4019.85 r180 top
C102 "10nF" CC1005-0402 -1132.03,4547.35 r270 bottom
C103 "10nF" CC1005-0402 -1197.03,4547.35 r270 bottom
C104 "10nF" CC1005-0402 -1137.03,4037.35 r90 bottom
C105 "10nF" CC1005-0402 -1282.03,4547.35 r270 bottom
C106 "10nF" CC1005-0402 -1252.03,4177.35 r90 bottom
C107 "10nF" CC1005-0402 -1282.03,4377.35 r270 bottom
C108 "10nF" CC1005-0402 -1237.03,4377.35 r270 bottom
C109 "22pF" CC1005-0402 -288.85,3747.39 r180 top
C110 "22pF" CC1005-0402 -287.85,3571.39 r180 top
C200 "100nF" CC1005-0402 73.15,4370.39 r90 top
C201 "100nF" CC1005-0402 -198,4953.89 r180 top
C202 "100nF" CC1005-0402 -127.34,2748.62 r90 bottom
C300 "100nF" CC1005-0402 -885.03,2322.1 r0 top
C301 "47nF" CC1005-0402 -533.67,2323.39 r180 top
C302 "1nF" CC1005-0402 -533.67,2373.39 r180 top
C303 "10uF" VE-100M0JTR-0305 -817.52,2195.79 r180 top
C304 "4,7uF" CC1005-0402 -188.93,2143.71 r90 top
C305 "1uF" CC1005-0402 -118.32,2073.9 r0 top
C306 "1uF" CC1005-0402 -118.32,2023.9 r0 top
C307 "4,7uF" CC1005-0402 -67.14,1973.9 r180 top
C308 "220uF" CAP_VE221 306.18,1279.89 r180 top
C309 "220pF" CC1005-0402 119.96,876.67 r90 top
C310 "4,7uF" CC1005-0402 -288.2,2143.78 r90 top
C311 "4,7uF" CC1005-0402 -118.32,1873.9 r0 top
C312 "4,7uF" CC1005-0402 -405,2143.78 r90 top
C313 "4,7uF" CC1005-0402 -338.2,2143.78 r90 top
C314 "100nF" CC1005-0402 -285,1386 r0 top
C315 "100nF" CC1005-0402 -119.64,1573.72 r90 top
C400 "1uF" CC1005-0402 -387,6277.89 r90 bottom
C401 "1uF" CC1005-0402 -435,6277.89 r90 bottom
C402 "1uF" CC1005-0402 -483,6277.89 r90 bottom
C403 "1uF" CC1005-0402 -531,6277.89 r90 bottom
C404 "1uF" CC1005-0402 -579,6277.89 r90 bottom
C405 "100nF" CC1005-0402 -844.12,3117.89 r270 top
C500 "4,7uF" CC1005-0402 -586.59,6092.16 r0 top
C501 "100nF" CC1005-0402 -587,6043 r0 top
C502 "4,7uF" CC1005-0402 -3.91,6056.52 r0 top
C503 "100nF" CC1005-0402 -3.91,5990.52 r0 top
C504 "100nF" CC1005-0402 -3.91,5923.52 r0 top
C505 "120pF" CC1005-0402_NP 84.09,5484.52 r90 top
C506 "0,3pF" CC1005-0402 255.09,5529.52 r270 top
C507 "100nF" CC1005-0402 -1410.27,5698.23 r0 top
C508 "100nF" CC1005-0402 -1410.27,5168.23 r0 top
C509 "10nF" CC1005-0402 -670,6299 r270 top
C600 "10uF" CC1608-0603 -1274.91,368.52 r90 top
C601 "10uF" CC1608-0603 -845.09,396.26 r270 top
C602 "10uF" CC1608-0603 -913.09,396.26 r270 top
C603 "100nF" CC1005-0402 -1064.91,184.52 r90 top
C604 "10uF" CC1608-0603 -1060,-181.11 r180 top
C605 "10uF" CC1608-0603 -1272.7,-152.02 r180 top
C610 "1uF" CC1005-0402 -17.85,4915.39 r180 top
C611 "100nF" CC1005-0402 -68.85,4965.39 r0 top
C612 "2,2uF" CC1608-0603 -49.12,4700.48 r180 top
C613 "10uF" CC1608-0603 -1041,3737.89 r90 top
C614 "10uF" CC1608-0603 -980,3737.89 r90 top
C615 "100nF" CC1005-0402 -379,4468 r180 bottom
C616 "100nF" CC1005-0402 -542,4468 r0 bottom
C617 "100nF" CC1005-0402 -809,4470.89 r0 bottom
C618 "100nF" CC1005-0402 -809,4188.89 r0 bottom
C619 "10nF" CC1005-0402 -809,4564.89 r0 bottom
C620 "10nF" CC1005-0402 -809,4517.89 r0 bottom
C621 "10nF" CC1005-0402 -809,4611.89 r0 bottom
C622 "10nF" CC1005-0402 -809,4659.89 r0 bottom
C623 "10nF" CC1005-0402 -511,4706.89 r270 top
C624 "10nF" CC1005-0402 -460.63,4707.17 r270 top
C625 "10uF" CC1608-0603 -859,3737.89 r90 top
C626 "10uF" CC1608-0603 -919,3737.89 r90 top
C627 "100nF" CC1005-0402 -809,4376.89 r0 bottom
C628 "100nF" CC1005-0402 -809,4423.89 r0 bottom
C629 "10nF" CC1005-0402 -460.63,4707.17 r270 bottom
C630 "10nF" CC1005-0402 -411,4706.89 r270 bottom
C631 "10nF" CC1005-0402 -809,4000.89 r0 bottom
C632 "10nF" CC1005-0402 -809,4141.89 r0 bottom
C633 "10nF" CC1005-0402 -809,4329.89 r0 bottom
C634 "10nF" CC1005-0402 -809,4282.89 r0 bottom
C635 "10uF" CC1608-0603 -1575,5132.89 r0 top
C636 "10uF" CC1608-0603 -1328,5019.89 r270 top
C637 "10uF" CC1608-0603 -218,3935.89 r90 top
C638 "100nF" CC1005-0402 -556.85,3955.39 r90 bottom
C639 "100nF" CC1005-0402 -603.85,3955.39 r90 bottom
C640 "100nF" CC1005-0402 -415.85,3955.39 r90 bottom
C641 "100nF" CC1005-0402 -462.85,3955.39 r90 bottom
C642 "10nF" CC1005-0402 -509.85,3955.21 r90 bottom
C643 "10nF" CC1005-0402 -368.85,3955.21 r90 bottom
C644 "10nF" CC1005-0402 -272.74,3955.21 r90 bottom
C645 "10nF" CC1005-0402 -320.85,3955.21 r90 bottom
C646 "10nF" CC1005-0402 -218,3937.86 r90 bottom
C647 "10nF" CC1005-0402 -109.18,4019.85 r180 bottom
C648 "10nF" CC1005-0402 -109.18,4117.85 r180 bottom
C649 "1uF" CC1005-0402 408.97,3833.21 r270 top
C650 "100nF" CC1005-0402 458.97,3782.21 r90 top
C651 "1uF" CC1005-0402 -105.85,3924.39 r0 top
C652 "10uF" CC1608-0603 -798,3737.89 r90 top
C653 "100nF" CC1005-0402 -511,4706.89 r270 bottom
C654 "100nF" CC1005-0402 -809,4047.89 r0 bottom
C655 "100nF" CC1005-0402 -809,4094.89 r0 bottom
C656 "100nF" CC1005-0402 -809,4235.89 r0 bottom
CON200 "MicroSD" MICRO_SD 52.1,2878.09 r270 top
CON300 "Phone_Jack" Phone_Jack -382.83,-407.22 r90 top
CON301 "Phone_Jack" Phone_Jack 81,-407.22 r90 top
D200 "RED" LED_0603 326.32,4283.49 r90 top
D201 "RED" LED_0603 -1069.66,6009.36 r90 bottom
D202 "YELLOW" LED_0603 -1134.66,6009.36 r90 bottom
D203 "GREEN" LED_0603 -1199.66,6009.36 r90 bottom
D204 "BLUE" LED_0603 -1264.66,6009.36 r90 bottom
D600 "RED" LED_0603 -1339.63,41.98 r0 top
ESD200 "ESD" ESD -1461,391 r0 top
FID200 "Fiducial" Fiducial 336.96,82.06 r90 top
FID201 "Fiducial" Fiducial -1547.66,3628.36 r90 top
FID202 "Fiducial" Fiducial 197.34,6250.36 r90 top
FID203 "Fiducial" Fiducial 343,1884 r90 top
FID204 "Fiducial" Fiducial -1505.51,871.31 r90 bottom
FID205 "Fiducial" Fiducial 194.85,6251.24 r90 bottom
FID206 "Fiducial" Fiducial -1548.15,3628.24 r90 bottom
FID207 "Fiducial" Fiducial 343,1884 r90 bottom
J200 "CONN HEADER" CON_JTAG -1470.66,2979.89 r90 top
J201 "CONN HEADER" CONECTOR_10_PIN 554,4653.89 r90 top
J202 "CONN HEADER" CONECTOR_10_PIN 552.97,4449.39 r270 top
J203 "CONN HEADER" CONECTOR_10_PIN -1543.63,1139.9 r90 top
J300 "Speaker" CON_IL-Z-2PL 230.96,441.44 r90 top
J301 "Speaker" CON_IL-Z-2PL 243.96,928.06 r90 top
J302 "CONN HEADER" CONECTOR_10_PIN -1543.63,2273.9 r270 top
J400 "LCD Connector" LCD_Connector -485,6101.89 r180 bottom
J600 "Micro USB B" "Micro USB" -1128,-312.11 r0 top
KB400 "Keypad_Button" KEYPAD_BUTTON#1 80.4,3252.02 r270 bottom
KB401 "Keypad_Button" KEYPAD_BUTTON#2 -583.97,3459.55 r0 bottom
KB402 "Keypad_Button" KEYPAD_BUTTON#2 -1248.34,3254.83 r270 bottom
KB403 "Keypad_Button" KEYPAD_BUTTON#1 -269.01,3254.83 r0 bottom
KB404 "Keypad_Button" KEYPAD_BUTTON#2 -583.97,3050.1 r0 bottom
KB405 "Keypad_Button" KEYPAD_BUTTON#2 -898.93,3254.83 r0 bottom
KB406 "Keypad_Button" KEYPAD_BUTTON#1 45.95,2685.93 r0 bottom
KB407 "Keypad_Button" KEYPAD_BUTTON#2 -583.97,2685.93 r0 bottom
KB408 "Keypad_Button" KEYPAD_BUTTON#2 -1213.89,2685.93 r0 bottom
KB409 "Keypad_Button" KEYPAD_BUTTON#1 6.58,2174.12 r0 bottom
KB410 "Keypad_Button" KEYPAD_BUTTON#2 -583.97,2174.12 r0 bottom
KB411 "Keypad_Button" KEYPAD_BUTTON#2 -1174.52,2174.12 r0 bottom
KB412 "Keypad_Button" KEYPAD_BUTTON#1 6.58,1701.68 r0 bottom
KB413 "Keypad_Button" KEYPAD_BUTTON#2 -583.97,1701.68 r0 bottom
KB414 "Keypad_Button" KEYPAD_BUTTON#2 -1174.52,1701.68 r0 bottom
KB415 "Keypad_Button" KEYPAD_BUTTON#1 6.58,1229.24 r0 bottom
KB416 "Keypad_Button" KEYPAD_BUTTON#2 -583.97,1229.24 r0 bottom
KB417 "Keypad_Button" KEYPAD_BUTTON#2 -1174.52,1229.24 r0 bottom
KB418 "Keypad_Button" KEYPAD_BUTTON#1 6.58,756.8 r0 bottom
KB419 "Keypad_Button" KEYPAD_BUTTON#2 -583.97,756.8 r0 bottom
KB420 "Keypad_Button" KEYPAD_BUTTON#2 -1174.52,756.8 r0 bottom
L300 "FB 60 Ohm @100MHz" INDUTOR_0603 -742.85,2324.39 r0 top
L500 "3nH" INDUTOR_0402 374.09,5729.52 r0 top
L600 "2,2uH" "POWER INDUCTOR" -1162.05,596.52 r0 top
L602 "Ferrite Bead 30 Ohm" INDUTOR_0603 -839,-405.11 r90 top
M300 "MIC" CON_IL-Z-2PL 205.96,2268.88 r90 top
P600 "Header 3x1" "HEADER 3x1" -1229,1081 r180 top
R100 "22R" CR1005-0402 -1019.03,4082.35 r0 top
R101 "22R" CR1005-0402 -1112.96,4716.35 r270 top
R102 "22R" CR1005-0402 -1019.03,4132.35 r0 top
R103 "22R" CR1005-0402 -1012.96,4716.35 r270 top
R104 "22R" CR1005-0402 -1019.03,4032.35 r0 top
R105 "22R" CR1005-0402 -1062.96,4716.35 r270 top
R106 "22R" CR1005-0402 -1019.03,3982.35 r0 top
R107 "22R" CR1005-0402 -964.03,4537.35 r180 top
R108 "22R" CR1005-0402 -1287.15,3955.24 r270 top
R109 "22R" CR1005-0402 -964.03,4587.35 r180 top
R110 "22R" CR1005-0402 -1382.15,3955.42 r270 top
R111 "22R" CR1005-0402 -964.03,4437.35 r180 top
R112 "22R" CR1005-0402 -1239.1,3955.7 r270 top
R113 "22R" CR1005-0402 -964.03,4487.35 r180 top
R114 "22R" CR1005-0402 -1334.33,3955.51 r270 top
R115 "22R" CR1005-0402 -964.03,4387.35 r180 top
R116 "22R" CR1005-0402 -1477.33,3955.83 r270 top
R117 "22R" CR1005-0402 -1670.03,4560.35 r270 top
R118 "22R" CR1005-0402 -1192.15,3955.24 r270 top
R119 "22R" CR1005-0402 -1560.03,4560.35 r270 top
R120 "22R" CR1005-0402 -1019.03,4182.35 r0 top
R121 "22R" CR1005-0402 -1615.03,4560.35 r270 top
R122 "22R" CR1005-0402 -1429.1,3955.7 r270 top
R123 "22R" CR1005-0402 -1505.03,4560.35 r270 top
R124 "22R" CR1005-0402 -1527.15,3955.42 r270 top
R125 "22R" CR1005-0402 -1407.03,4716.35 r270 top
R126 "22R" CR1005-0402 -1019.03,4282.35 r0 top
R127 "22R" CR1005-0402 -1227.03,4716.35 r270 top
R128 "22R" CR1005-0402 -1019.03,4232.35 r0 top
R129 "22R" CR1005-0402 -1347.03,4716.35 r270 top
R130 "22R" CR1005-0402 -1287.03,4716.35 r270 top
R131 "22R" CR1005-0402 -744.85,4006.39 r270 top
R132 "22R" CR1005-0402 -697.85,4006.39 r270 top
R133 "10K" CR1005-0402 -509.85,4006.39 r270 top
R134 "22R" CR1005-0402 -603.85,3955.39 r90 top
R135 "10K" CR1005-0402 -368.85,4006.39 r270 top
R136 "22R" CR1005-0402 -650.85,3955.39 r90 top
R137 "100K" CR1005-0402 -160.18,4068.85 r0 top
R138 "22R" CR1005-0402 -556.85,3955.39 r90 top
R139 "33R" CR1005-0402 -109.18,4170.39 r180 top
R140 "22R" CR1005-0402 -415.85,3955.39 r90 top
R141 "22R" CR1005-0402 -462.85,3955.39 r90 top
R142 "22R" CR1005-0402 -320.85,4006.39 r270 top
R143 "33K" CR1005-0402 -109.18,4117.85 r180 top
R144 "10K" CR1005-0402_NP -1577.19,3904.24 r90 top
R145 "10M" CR1005-0402 -339.85,3684.39 r270 top
R146 "10K" CR1005-0402 -109.18,4220.39 r180 top
R200 "100R" CR1608-0603 326,4201.89 r270 top
R201 "10K" CR1005-0402 324.32,4445.24 r90 top
R202 "0R" CR1005-0402 -108.74,4320.39 r180 bottom
R203 "0R" CR1005-0402 -107.74,4619.99 r180 bottom
R204 "0R" CR1005-0402 -108.74,4370.39 r180 bottom
R205 "0R" CR1005-0402 509.97,3782.8 r90 top
R206 "1K2" CR1005-0402 15.15,4570.39 r180 top
R207 "1K2" CR1005-0402 15.15,4520.39 r180 top
R208 "0R" CR1005-0402 -107.74,4620.39 r180 top
R209 "0R" CR1005-0402 -107.85,4570.39 r180 bottom
R210 "100R" CR1608-0603 -1069.66,5939.36 r270 bottom
R211 "100R" CR1608-0603 -1134.66,5939.36 r270 bottom
R212 "100R" CR1608-0603 -1199.66,5939.36 r270 bottom
R213 "100R" CR1608-0603 -1264.66,5939.36 r270 bottom
R214 "49R9" CR1005-0402_NP -318.74,4704.99 r180 top
R215 "0R" CR1005-0402 -318.74,4655.99 r180 top
R216 "49R9" CR1005-0402_NP -107.85,4470.39 r180 bottom
R217 "49R9" CR1005-0402_NP -107.85,4420.39 r180 bottom
R218 "0R" CR1005-0402 -107.85,4520.39 r180 bottom
R219 "10K" CR1005-0402 -696.74,4663.99 r90 top
R220 "10K" CR1005-0402 -743.74,4663.99 r90 top
R221 "10K" CR1005-0402 -616.74,4713.99 r0 top
R222 "10K" CR1005-0402_NP -565.74,4665.99 r180 top
R223 "10K" CR1005-0402 4.97,3540.39 r0 top
R224 "10K" CR1005-0402_NP -246.74,4803.99 r0 top
R225 "10K" CR1005-0402 -752.74,4903.99 r180 top
R226 "10K" CR1005-0402 -752.74,4853.99 r180 top
R227 "10K" CR1005-0402 -752.74,4953.99 r180 top
R228 "10K" CR1005-0402 -246.74,4903.99 r0 top
R229 "10K" CR1005-0402 -370.34,2958.62 r0 top
R230 "10K" CR1005-0402 159.16,2438.8 r90 top
R231 "0R" CR1005-0402 -370.34,2779.62 r0 top
R232 "0R" CR1005-0402 -370.34,2912.62 r0 top
R233 "0R" CR1005-0402 -370.34,2692.62 r0 top
R234 "0R" CR1005-0402 -370.34,2865.62 r0 top
R235 "0R" CR1005-0402 -370.34,2609.62 r0 top
R236 "0R" CR1005-0402 111.16,2438.8 r90 top
R237 "33R" CR1005-0402 -159.03,4570.39 r0 top
R238 "33R" CR1005-0402 -159.03,4520.39 r0 top
R303 "10K" CR1005-0402 -277.57,1784.33 r270 top
R304 "2K2" CR1005-0402 -238.2,2194.96 r270 top
R306 "10K" CR1005-0402 -272.2,1574.44 r90 top
R308 "22R" CR1005-0402 -107.85,4470.39 r180 top
R309 "22R" CR1005-0402 -107.85,4420.39 r180 top
R310 "100K" CR1005-0402 81,0 r0 top
R311 "22R" CR1005-0402 -108.74,4320.39 r180 top
R312 "22R" CR1005-0402 -108.74,4370.39 r180 top
R313 "0R" CR1005-0402 -118.32,1923.9 r0 top
R314 "1K2" CR1005-0402 0,0 r90 top
R315 "330K" CR1005-0402 66.23,1873.9 r180 top
R316 "100K" CR1005-0402 66.23,1923.9 r180 top
R317 "0R" CR1005-0402 -194.44,1624.9 r270 top
R318 "47K" CR1005-0402 69.96,927.85 r270 top
R319 "0R" CR1005-0402 -377.57,1733.15 r90 top
R320 "0R" CR1005-0402 -327.57,1733.15 r90 top
R321 "0R" CR1005-0402 -528.95,2073.9 r0 top
R322 "0R" CR1005-0402 -528.95,2023.9 r0 top
R323 "0R" CR1005-0402 -528.95,1973.9 r0 top
R324 "0R" CR1005-0402 -528.95,1923.9 r0 top
R325 "0R" CR1005-0402 -528.95,1873.9 r0 top
R326 "22R" CR1005-0402 -107.85,4270.39 r180 top
R327 "0R" CR1005-0402 -377.85,1620.49 r90 top
R328 "0R" CR1005-0402 -327.85,1620.49 r90 top
R329 "0R" CR1005-0402 -648.63,2092.01 r0 top
R330 "0R" CR1005-0402 -648.63,2032.95 r0 top
R331 "0R" CR1005-0402 -648.63,1973.9 r0 top
R332 "0R" CR1005-0402 -648.63,1914.84 r0 top
R333 "0R" CR1005-0402 -648.63,1855.79 r0 top
R400 "10K" CR1005-0402 -1139,2910.71 r0 top
R401 "0R" CR1005-0402 -36.03,4570.39 r0 bottom
R402 "10K" CR1005-0402 -1138,3099.89 r0 top
R403 "0R" CR1005-0402 -36.03,4520.39 r0 bottom
R404 "0R" CR1005-0402 -894.12,3118.07 r270 top
R405 "0R" CR1005-0402 -944.12,3118.07 r270 top
R406 "0R" CR1005-0402 -994.12,3118.07 r270 top
R407 "0R" CR1005-0402 -794.12,3118.07 r270 top
R408 "0R" CR1005-0402 -1139,2816.89 r0 top
R409 "0R" CR1005-0402 -1139,2863.89 r0 top
R410 "0R" CR1005-0402 -1139,2957.71 r0 top
R411 "0R" CR1005-0402 -1139,3051.89 r0 top
R412 "10K" CR1005-0402 -1088,3004.89 r180 top
R500 "0R" CR1005-0402 84.09,5622.52 r180 top
R501 "200K" CR1005-0402 -1359.09,5763.23 r180 top
R502 "10K" CR1005-0402 -1410.27,6213.23 r0 top
R503 "10K" CR1005-0402 -1410.27,6138.23 r0 top
R504 "10K" CR1005-0402 -1410.27,6063.23 r0 top
R505 "10K" CR1005-0402 -1410.27,5988.23 r0 top
R506 "10K" CR1005-0402 -1410.27,5913.23 r0 top
R507 "10K" CR1005-0402 -1410.27,5838.23 r0 top
R508 "10K" CR1005-0402 -1266.91,6028.52 r90 top
R509 "10K" CR1005-0402 -1191.91,6028.52 r90 top
R510 "10K" CR1005-0402 -1116.91,6028.52 r90 top
R511 "10K" CR1005-0402 -1041.91,6028.52 r90 top
R512 "10K" CR1005-0402 -966.91,6028.52 r90 top
R513 "10K" CR1005-0402 -891.91,6028.52 r90 top
R514 "200K" CR1005-0402 -1359.09,5233.23 r180 top
R515 "10K" CR1005-0402 -1359.09,5613.23 r180 top
R516 "10K" CR1005-0402 -1359.09,5538.23 r180 top
R517 "10K" CR1005-0402 -1359.09,5463.23 r180 top
R518 "10K" CR1005-0402 -1359.09,5388.23 r180 top
R519 "10K" CR1005-0402 -1359.09,5313.23 r180 top
R520 "10K" CR1005-0402 -1266.91,5523.52 r90 top
R521 "10K" CR1005-0402 -1191.91,5523.52 r90 top
R522 "10K" CR1005-0402 -1116.91,5523.52 r90 top
R523 "10K" CR1005-0402 -1041.91,5523.52 r90 top
R524 "10K" CR1005-0402 -966.91,5523.52 r90 top
R525 "0R" CR1005-0402 -740.91,6023.52 r90 top
R600 "1K5" CR1608-0603 -1339.63,-22.02 r0 top
R601 "0R" CR3225-1210 -743,329.89 r90 top
R602 "100R" CR1608-0603 -1124.91,236.52 r180 top
R603 "0R" CR1608-0603 -1060,-114.11 r180 top
R604 "0R" CR1608-0603 -1339.63,-86.02 r0 top
R605 "680R" CR1005-0402 -850,-10.33 r180 top
R606 "1K2" CR1005-0402 -901,45.04 r0 top
R607 "10K" CR1005-0402 -1339.63,98.98 r0 top
R608 "10K" CR1005-0402 -1288.45,146.98 r180 top
R611 "0R" CR3225-1210 -1233.13,4953.44 r0 top
R612 "0R" CR1608-0603 -105.85,3866.39 r0 top
R613 "20K5" CR1005-0402 -112.85,3746.39 r90 top
R614 "10K" CR1005-0402 -217.85,3797.39 r270 top
R615 "255K" CR1005-0402 -164.85,3797.39 r270 top
SW200 "SW" PUSH-PTS525 113.26,4536.99 r90 top
SW201 "SW" PUSH-PTS525 229,3310.22 r180 top
TP100 "Test Point" "Test Point" 3249.37,3483.98 r90 top
TP101 "Test Point" "Test Point" 2649.37,3483.98 r90 top
TP102 "Test Point" "Test Point" 2309.37,3483.98 r90 top
TP103 "Test Point" "Test Point" 1709.37,3483.98 r90 top
TP104 "Test Point" "Test Point" 1089.37,3483.98 r90 top
TP105 "Test Point" "Test Point" 2943.55,3577.02 r90 top
TP106 "Test Point" "Test Point" 2345.37,3775.98 r90 top
TP107 "Test Point" "Test Point" 1336.55,3678.02 r90 top
TP400 "Test Point" "Test Point" -1090,2765.89 r90 top
TP401 "Test Point" "Test Point" -727,2951 r90 top
TP402 "Test Point" "Test Point" -633,2853 r90 top
TP403 "Test Point" "Test Point" -677,2908 r90 top
TP500 "Test Point" "Test Point" -114.91,5224.52 r0 top
TP501 "Test Point" "Test Point" -193.65,5224.52 r0 top
TP502 "Test Point" "Test Point" -154.28,5288.52 r0 top
TP503 "Test Point" "Test Point" -155.28,5981.52 r0 top
TP504 "Test Point" "Test Point" -233.02,5288.52 r0 top
TP505 "Test Point" "Test Point" -273.39,5980.52 r0 top
TP506 "Test Point" "Test Point" -311.91,5288.52 r0 top
TP507 "Test Point" "Test Point" -390.5,5288.52 r0 top
TP508 "Test Point" "Test Point" -351.13,5224.52 r0 top
TP509 "Test Point" "Test Point" -429.87,5224.52 r0 top
TP510 "Test Point" "Test Point" -508.61,5224.52 r0 top
TP511 "Test Point" "Test Point" -272.39,5224.52 r0 top
TP512 "Test Point" "Test Point" -469.24,5288.52 r0 top
TP600 "Test Point" "Test Point" -914.27,102.82 r90 top
U100 "ADSP-BF516KBCZ-4F4" BGA168 -259.03,4564.35 r270 top
U101 "MT48LC16M16A2BG-75" VFBGA54 -1387.03,4417.35 r0 top
U200 "CAT811S" SOT-143 159.15,4350.39 r90 top
U202 "S25FL064P0XNFI000" WSON8 -635.74,4953.99 r0 top
U300 "FSA2259" QFN-10FSA -260.2,1482.2 r180 top
U301 "WM8940" QFN24 -248.83,2043.78 r270 top
U302 "74LVC1G384" SOT753 -119.64,1780.65 r270 top
U400 "ADP5587" QFN-24 -969,2907.89 r0 top
U500 "NVT2006PW118" TSSOP16 -1006.91,5753.52 r180 top
U501 "TiWi01-R2" WIFI_MODULE -116,5878 r270 top
U502 "NVT2006PW118" TSSOP16 -1006.91,5243.52 r180 top
U600 "TPS63001DRCR" SON10 -1045.91,435.52 r270 top
U601 "BQ24090" MSOP10 -993.63,-22.02 r180 top
U604 "AME8800DEETZ" SOT-23 -116.12,4838.48 r0 top
U605 "NCP1117ST18T3G" SOT223 -1542.13,4952.44 r180 top
U606 "TPS73601" "SOT223 - 6P" 54.15,3898.39 r0 top
X100 "32.768KHz" XTAL_32.768kHz -420.85,3723.39 r180 top
Y100 "25MHz" OSC_25MHz 121.64,4069.85 r270 top
Y500 "32,768K" OSCILLATOR_32K -804,6248 r270 top

## Footprints (in the part's own frame and the unit in brackets; to place one, negate y for a bottom-side part, rotate by r counter-clockwise, add the part's x,y. Pads: shape width x height; smd on the part's side, far side on the other; paste and mask are expansions set on the pad)
ANTENNA [mm]
  rect 1.5x1.6 smd: A(0,0) B(0,3.4)
  rect 1.5x0.4 smd: ANT(0,1.7)
BGA168 [mm] "BGA, 168-Leads, Body 12,0x12,0mm,  Pitch 0,80mm"
  round 0.4 smd: A1(0,0) A2(0.8,0) A3(1.6,0) A4(2.4,0) A5(3.2,0) A6(4,0) A7(4.8,0) A8(5.6,0) A9(6.4,0) A10(7.2,0) A11(8,0) A12(8.8,0) A13(9.6,0) A14(10.4,0) B1(0,-0.8) B2(0.8,-0.8) B3(1.6,-0.8) B4(2.4,-0.8) B5(3.2,-0.8) B6(4,-0.8) B7(4.8,-0.8) B8(5.6,-0.8) B9(6.4,-0.8) B10(7.2,-0.8) B11(8,-0.8) B12(8.8,-0.8) B13(9.6,-0.8) B14(10.4,-0.8) C1(0,-1.6) C2(0.8,-1.6) C3(1.6,-1.6) C4(2.4,-1.6) C5(3.2,-1.6) C6(4,-1.6) C7(4.8,-1.6) C8(5.6,-1.6) C9(6.4,-1.6) C10(7.2,-1.6) C11(8,-1.6) C12(8.8,-1.6) C13(9.6,-1.6) C14(10.4,-1.6) D1(0,-2.4) D2(0.8,-2.4) D3(1.6,-2.4) D12(8.8,-2.4) D13(9.6,-2.4) D14(10.4,-2.4) E1(0,-3.2) E2(0.8,-3.2) E3(1.6,-3.2) E5(3.2,-3.2) E6(4,-3.2) E7(4.8,-3.2) E8(5.6,-3.2) E9(6.4,-3.2) E10(7.2,-3.2) E12(8.8,-3.2) E13(9.6,-3.2) E14(10.4,-3.2) F1(0,-4) F2(0.8,-4) F3(1.6,-4) F5(3.2,-4) F6(4,-4) F7(4.8,-4) F8(5.6,-4) F9(6.4,-4) F10(7.2,-4) F12(8.8,-4) F13(9.6,-4) F14(10.4,-4) G1(0,-4.8) G2(0.8,-4.8) G3(1.6,-4.8) G5(3.2,-4.8) G6(4,-4.8) G7(4.8,-4.8) G8(5.6,-4.8) G9(6.4,-4.8) G10(7.2,-4.8) G12(8.8,-4.8) G13(9.6,-4.8) G14(10.4,-4.8) H1(0,-5.6) H2(0.8,-5.6) H3(1.6,-5.6) H5(3.2,-5.6) H6(4,-5.6) H7(4.8,-5.6) H8(5.6,-5.6) H9(6.4,-5.6) H10(7.2,-5.6) H12(8.8,-5.6) H13(9.6,-5.6) H14(10.4,-5.6) J1(0,-6.4) J2(0.8,-6.4) J3(1.6,-6.4) J5(3.2,-6.4) J6(4,-6.4) J7(4.8,-6.4) J8(5.6,-6.4) J9(6.4,-6.4) J10(7.2,-6.4) J12(8.8,-6.4) J13(9.6,-6.4) J14(10.4,-6.4) K1(0,-7.2) K2(0.8,-7.2) K3(1.6,-7.2) K5(3.2,-7.2) K6(4,-7.2) K7(4.8,-7.2) K8(5.6,-7.2) K9(6.4,-7.2) K10(7.2,-7.2) K12(8.8,-7.2) K13(9.6,-7.2) K14(10.4,-7.2) L1(0,-8) L2(0.8,-8) L3(1.6,-8) L12(8.8,-8) L13(9.6,-8) L14(10.4,-8) M1(0,-8.8) M2(0.8,-8.8) M3(1.6,-8.8) M4(2.4,-8.8) M5(3.2,-8.8) M6(4,-8.8) M7(4.8,-8.8) M8(5.6,-8.8) M9(6.4,-8.8) M10(7.2,-8.8) M11(8,-8.8) M12(8.8,-8.8) M13(9.6,-8.8) M14(10.4,-8.8) N1(0,-9.6) N2(0.8,-9.6) N3(1.6,-9.6) N4(2.4,-9.6) N5(3.2,-9.6) N6(4,-9.6) N7(4.8,-9.6) N8(5.6,-9.6) N9(6.4,-9.6) N10(7.2,-9.6) N11(8,-9.6) N12(8.8,-9.6) N13(9.6,-9.6) N14(10.4,-9.6) P1(0,-10.4) P2(0.8,-10.4) P3(1.6,-10.4) P4(2.4,-10.4) P5(3.2,-10.4) P6(4,-10.4) P7(4.8,-10.4) P8(5.6,-10.4) P9(6.4,-10.4) P10(7.2,-10.4) P11(8,-10.4) P12(8.8,-10.4) P13(9.6,-10.4) P14(10.4,-10.4)
  silkscreen extent -1.57,-11.2 11.2,0.8, body extent -0.8,-11.2 11.2,0.8, height 1.5
BOARD_ID [mil] "BOARD_ID"
  silkscreen extent -17,0 177,223
CAP_VE221 [mm] "Electrolytic Capacitor 220uF"
  rect 4x0.9 smd: 1(0,0) 2(6,0)
  silkscreen extent -0.3,-3.3 6.3,3.3
CC1005-0402 [mm] "Chip Capacitor; Body 1.0 x 0.5 mm (LxW typ)"
  rect 0.9x0.7 smd: 1(0,0) 2(1.3,0)
  silkscreen extent -0.62,-0.52 1.92,0.52, body extent 0.15,-0.25 1.15,0.25, height 0.5
CC1005-0402_NP [mm] "Chip Capacitor; Body 1.0 x 0.5 mm (LxW typ)"
  rect 0.9x0.7 smd: 1(0,0) 2(1.3,0)
  silkscreen extent -0.62,-0.52 1.92,0.52
CC1608-0603 [mm] "Chip Capacitor; Body 1.6 x 0.8 mm (LxW typ)"
  rect 1.1x1 smd: 1(0,0) 2(1.7,0)
  silkscreen extent -0.72,-0.67 2.42,0.67, body extent 0.05,-0.4 1.65,0.4, height 0.3
CON_IL-Z-2PL [mm] "Connector"
  rect 0.9x3.7 smd: 1(0,0) 2(-1.25,0)
  rect 2.7x3 smd: ""(-4.15,-3.404) ""(2.9,-3.404)
  silkscreen extent -4.15,-6.23 2.9,-0.4
CON_JTAG [mm]
  rect 0.74x1.85 smd: 1(2.54,-2.125) 2(2.54,2.125) 3(1.27,-2.125) 4(1.27,2.125) 5(0,-2.125) 6(0,2.125) 7(-1.27,-2.125) 8(-1.27,2.125) 9(-2.54,-2.125) 10(-2.54,2.125)
  silkscreen extent -5.27,-1.27 5.27,2.97
CONECTOR_10_PIN [mm]
  round 1.1 hole 0.7: 1(0,0) 2(1.27,0) 3(2.54,0) 4(3.81,0) 5(5.08,0) 6(6.35,0) 7(7.62,0) 8(8.89,0) 9(10.16,0) 10(11.43,0)
  silkscreen extent -1.81,-0.98 12.25,0.98
CR1005-0402 [mm] "Chip Resistor; Body 1.1 x 0.5 mm (LxW typ)"
  rect 0.9x0.7 smd: 1(0,0) 2(1.3,0)
  silkscreen extent -0.62,-0.52 1.92,0.52, body extent 0.15,-0.3 1.15,0.3, height 0.2
CR1005-0402_NP [mm] "Chip Resistor; Body 1.1 x 0.5 mm (LxW typ)"
  rect 0.9x0.7 smd: 1(0,0) 2(1.3,0)
  silkscreen extent -0.62,-0.52 1.92,0.52
CR1608-0603 [mm] "Chip Resistor; Body 1.6 x 0.8 mm (LxW typ)"
  rect 1.1x1 smd: 1(0,0) 2(1.7,0)
  silkscreen extent -0.72,-0.67 2.42,0.67, body extent 0.05,-0.4 1.65,0.4, height 0.3
CR3225-1210 [mm] "Chip Capacitor; Body 3.2 x 2.5 mm (LxW typ)"
  rect 1.6x2.7 smd: 1(0,0) 2(2.8,0)
  silkscreen extent -0.99,-1.55 3.78,1.55
ESD [mil]
  silkscreen extent -130,-116 141,131
Fiducial [mil] "Fiducial"
  Component Side circle w39.37: c0,0 r19.68
  Component Side keep-out circle w11.81: c0,0 r84.65
"HEADER 3x1" [mm]
  rect 1.3x4.5 smd: 1(0,0) 2(2.5,0) 3(5,0)
  rect 1.8x3.9 smd: ""(-3.2,6.8) ""(8.2,6.8)
  silkscreen extent -4.45,-2.51 9.42,9.58
INDUTOR_0402 [mm]
  rect 0.9x0.7 smd: 1(0,0) 2(1.3,0)
  silkscreen extent -0.62,-0.52 1.92,0.52, body extent 0.15,-0.25 1.15,0.25, height 0.25
INDUTOR_0603 [mm]
  rect 1.1x1 smd: 1(0,0) 2(1.7,0)
  silkscreen extent -0.72,-0.67 2.42,0.67
KEYPAD_BUTTON#1 [mil]
  oval 47.24x10 smd: 1(-99.18,0) 2(99.18,0)
  Component Side lines w10: 25.5,68.86 25.5,-68.87 ; -25.5,68.87 -25.5,-68.86 ; 34.5,67.01 34.5,-67 ; -34.5,67 -34.5,-67.01 ; 43.18,64.02 43.18,-64 ; -43.18,64 -43.18,-64.02 ; 52.18,59.02 52.18,-59 ; -52.18,59 -52.18,-59.02 ; 61.18,52.01 61.18,-52 ; -61.18,52 -61.18,-52.01 ; 70.18,43 70.18,-43 ; -70.18,43 -70.18,-43 ; 79.18,29.02 79.18,0 79.18,-29 ; -79.18,29 -79.18,-29.02 ; 16.5,70.87 cw(c16.5,0) 16.5,-70.87 16.5,70.87 ; -16.5,70.87 ccw(c-16.5,0) -16.5,-70.87 -16.5,70.87
  silkscreen extent -118,-93 118,93
KEYPAD_BUTTON#2 [mil]
  oval 47.24x10 smd: 1(-99.18,0) 2(99.18,0)
  Component Side lines w10: -79.18,29 -79.18,-29.02 ; -70.18,43 -70.18,-43 ; -61.18,52 -61.18,-52.01 ; -52.18,59 -52.18,-59.02 ; -43.18,64 -43.18,-64.02 ; -34.5,67 -34.5,-67.01 ; -25.5,68.87 -25.5,-68.86 ; 25.5,68.86 25.5,-68.87 ; 34.5,67.01 34.5,-67 ; 43.18,64.02 43.18,-64 ; 52.18,59.02 52.18,-59 ; 61.18,52.01 61.18,-52 ; 70.18,43 70.18,-43 ; 79.18,29.02 79.18,-29 ; -16.5,70.87 ccw(c-16.5,0) -16.5,-70.87 -16.5,70.87 ; 16.5,70.87 cw(c16.5,0) 16.5,-70.87 16.5,70.87
  silkscreen extent -118,-93 118,93
LCD_Connector [mm]
  rect 0.3x1.4 smd: 1(3.25,1.575) 2(2.75,1.575) 3(2.25,1.575) 4(1.75,1.575) 5(1.25,1.575) 6(0.75,1.575) 7(0.25,1.575) 8(-0.25,1.575) 9(-0.75,1.575) 10(-1.25,1.575) 11(-1.75,1.575) 12(-2.25,1.575) 13(-2.75,1.575) 14(-3.25,1.575)
  rect 1.6x2.2 smd: ""(-5.9,-1.575) ""(5.9,-1.575)
  silkscreen extent -5.9,-3.89 5.9,1.45
LED_0603 [mm] "LED 0603"
  rect 1.1x1 smd: 1(0,0) 2(1.7,0)
  silkscreen extent -0.76,-0.71 2.59,0.71
LOGO [mil]
  silkscreen extent -334,-187 310,273
"Micro USB" [mm]
  rect 0.4x1.75 smd: 1(0,0) 2(0.65,0) 3(1.3,0) 4(1.95,0) 5(2.6,0)
  rect 1.8x3.15 smd: 6(-1.6,-2.35) 6(4.2,-2.35)
  rect 2x1.4 smd: 6(-1.6,0.175) 6(4.2,0.175)
  round 0 hole 0.66 unplated: 6(-1.45,-3.095) 6(-1.45,-2.95) 6(-1.45,-2.9) 6(-1.45,-2.9) 6(-1.45,-2.85) 6(-1.45,-2.8) 6(-1.45,-2.75) 6(-1.45,-2.7) 6(-1.45,-2.65) 6(-1.45,-2.555) 6(-1.125,-0.02) 6(-1.125,0.08) 6(-1.125,0.175) 6(-1.125,0.2) 6(-1.125,0.272) 6(-1.125,0.37) 6(3.725,-0.02) 6(3.725,0.08) 6(3.725,0.175) 6(3.725,0.175) 6(3.725,0.25) 6(3.725,0.37) 6(4.05,-3.095) 6(4.05,-3) 6(4.05,-2.9) 6(4.05,-2.85) 6(4.05,-2.8) 6(4.05,-2.75) 6(4.05,-2.7) 6(4.05,-2.65) 6(4.05,-2.6) 6(4.05,-2.555)
  rect 1.425x2.5 smd: 6(0.337,-3.075) 6(2.262,-3.075)
  silkscreen extent -3.7,-4.75 6.43,2.03
MICRO_SD [mm]
  rect 0.8x1.2 smd: 1(-1.92,-6.45) 2(-0.82,-6.45) 3(0.28,-6.45) 4(1.38,-6.45) 5(2.48,-6.45) 6(3.58,-6.45) 7(4.68,-6.45) 8(5.78,-6.45) 9(6.78,-6.45)
  rect 1.7x1 smd: 10(7.43,1.5)
  rect 1.3x2.5 smd: ""(-7.63,6.45) ""(-7.63,-2.05) ""(7.63,6.45)
  rect 1.3x1.7 smd: ""(7.63,-0.1)
  silkscreen extent -7.5,-6.75 7.5,9.75
MSOP10 [mm] "TSSOP, 10-Leads, Body 3,1x3,1mm (max), Pitch 0,50mm, IPC Medium Density"
  rect 1.65x0.3 smd: 1(0,0) 2(0,-0.5) 3(0,-1) 4(0,-1.5) 5(0,-2) 6(4.1,-2) 7(4.1,-1.5) 8(4.1,-1) 9(4.1,-0.5) 10(4.1,0)
  rect 1.8x2 smd: 3(2.05,-1)
  silkscreen extent 0.36,-2.55 3.13,0.55
OSC_25MHz [mm]
  rect 1.7x1.5 smd: 1(0,0) 2(-2.54,0) 3(-2.54,-2.2) 4(0,-2.2)
  silkscreen extent -3.77,-3.3 1.23,1.69
OSCILLATOR_32K [mm]
  rect 1.5x1.1 smd: 1(0,0) 2(2.2,0) 3(2.2,1.6) 4(0,1.6)
  silkscreen extent -1.56,-0.77 3.17,2.4
Phone_Jack [mm] "Phone_Jack"
  rect 2.4x2.45 smd: 1(0,0) 2(8.3,8.55) 3(3,0) 5(6,0)
  rect 2.4x1.8 smd: 4(1.9,8.875)
  round 1.9 hole 1.9: ""(-0.7,4.375)
  round 1.4 hole 1.4: ""(4.7,4.375)
  silkscreen extent -2.9,0.58 9.24,7.98
"POWER INDUCTOR" [mm]
  rect 1x1.3 smd: 1(0,0) 2(3.9,0)
  silkscreen extent -0.44,-2.51 4.34,2.51, body extent 0.2,-1.9 3.7,1.9, height 1.2
PUSH-PTS525 [mm]
  rect 2.3x1.1 smd: 1(0,0) 2(5.7,0) 3(0,-3.7) 4(5.7,-3.7)
  silkscreen extent -1.52,-4.72 7.22,1.02
QFN24 [mm] "WM8940"
  oval 0.65x0.3 smd: 1(0,0) 2(0,-0.5) 3(0,-1) 4(0,-1.5) 5(0,-2) 6(0,-2.5) 13(4.05,-2.5) 14(4.05,-2) 15(4.05,-1.5) 16(4.05,-1) 17(4.05,-0.5) 18(4.05,0)
  rect 2.8x2.8 smd: 6(2.025,-1.25)
  oval 0.3x0.65 smd: 7(0.775,-3.275) 8(1.275,-3.275) 9(1.775,-3.275) 10(2.275,-3.275) 11(2.775,-3.275) 12(3.275,-3.275) 19(3.275,0.775) 20(2.775,0.775) 21(2.275,0.775) 22(1.775,0.775) 23(1.275,0.775) 24(0.775,0.775)
  silkscreen extent -1,-3.25 4.03,0.75
QFN-10FSA [mm]
  oval 0.65x0.25 smd: 1(-0.725,0.2) 2(-0.725,-0.2) 6(0.725,-0.2) 7(0.725,0.2)
  oval 0.25x0.65 smd: 3(-0.4,-0.925) 4(0,-0.925) 5(0.4,-0.925) 8(0.4,0.925) 9(0,0.925) 10(-0.4,0.925)
  silkscreen extent -1.37,-0.9 1.02,0.9
QFN-24 [mm] "ADP5588"
  rect 2.3x2.3 smd: 0(2.152,-1.25)
  rect 1x0.25 smd: 1(0,0) 2(0,-0.5) 3(0,-1) 4(0,-1.5) 5(0,-2) 6(0,-2.5) 13(4.304,-2.5) 14(4.304,-2) 15(4.304,-1.5) 16(4.304,-1) 17(4.304,-0.5) 18(4.304,0)
  rect 0.25x1 smd: 7(0.902,-3.402) 8(1.402,-3.402) 9(1.902,-3.402) 10(2.402,-3.402) 11(2.902,-3.402) 12(3.402,-3.402) 19(3.402,0.902) 20(2.902,0.902) 21(2.402,0.902) 22(1.902,0.902) 23(1.402,0.902) 24(0.902,0.902)
  silkscreen extent -1,-3.25 4.15,0.75
SON10 [mm] "SON, 14-Leads, Body 3,2x3,2mm (max), Pitch 0,50mm, IPC Medium Density"
  oval 0.9x0.3 smd: 1(0,0) 2(0,-0.5) 3(0,-1) 4(0,-1.5) 5(0,-2) 6(2.7,-2) 7(2.7,-1.5) 8(2.7,-1) 9(2.7,-0.5) 10(2.7,0)
  oval 0.3x1 smd: 15(1.1,0.35) 15(1.1,-2.35) 15(1.6,0.35) 15(1.6,-2.35)
  rect 1.3x2 smd: 15(1.35,-1)
  silkscreen extent -1.03,-2.6 2.95,0.6, body extent -0.15,-2.5 2.85,0.5, height 0.92
SOT223 [mm] "SOT223, 4-Leads, Body 6,7x7,3mm (max), Pitch 2,30mm, IPC Medium Density"
  rect 2.4x1 smd: 1(-2.9,2.3) 2(-2.9,0) 3(-2.9,-2.3)
  rect 2.4x3.3 smd: 4(2.9,0)
  silkscreen extent -3.03,-3.35 1.3,3.47, body extent -1.85,-3.35 1.85,3.35, height 1.8
"SOT223 - 6P" [mm]
  rect 2.2x0.65 smd: 1(0,0) 2(0,-1.27) 3(0,-2.54) 4(0,-3.81) 5(0,-5.08)
  rect 2.2x3.3 smd: 6(6,-2.54)
  silkscreen extent -0.12,-5.81 4.5,1
SOT753 [mm] "SOT23, 5-Leads, Body 3,1x3,0mm (max), Pitch 0,95mm, IPC Medium Density"
  rect 1.15x0.6 smd: 1(0,0) 2(0,-0.95) 3(0,-1.9) 4(2.35,-1.9) 5(2.35,0)
  silkscreen extent -0.12,-2.5 1.38,0.98
SOT-23 [mm] "AME8800AEETZ"
  rect 1.4x0.6 smd: 1(0,0) 2(0,-1.9) 3(2.4,-0.95)
  silkscreen extent -0.12,-2.5 2.1,0.97
SOT-143 [mm] "CAT811S"
  rect 1.35x1 smd: 1(0,0)
  rect 1.35x0.6 smd: 2(0,-1.72) 3(2.05,-1.72) 4(2.05,0.2)
  silkscreen extent -0.12,-2.26 1.73,1.17
"Test Point" [mm]
  round 0.9 smd: 1(0,0)
  silkscreen extent -0.53,-0.53 0.53,0.53
TSSOP16 [mm] "TSOP, 16-Leads, Body 5,1x4,5mm (max), Pitch 0,65mm, IPC Medium Density"
  oval 1.7x0.35 smd: 1(0,0) 2(0,-0.65) 3(0,-1.3) 4(0,-1.95) 5(0,-2.6) 6(0,-3.25) 7(0,-3.9) 8(0,-4.55) 9(5.7,-4.55) 10(5.7,-3.9) 11(5.7,-3.25) 12(5.7,-2.6) 13(5.7,-1.95) 14(5.7,-1.3) 15(5.7,-0.65) 16(5.7,0)
  silkscreen extent -0.13,-4.82 4.45,0.85, body extent 0.6,-4.82 5.1,0.28, height 1.1
VE-100M0JTR-0305 [mm]
  rect 2.2x0.9 smd: 1(0,0) 2(3,0)
  silkscreen extent -0.25,-1.75 3.25,1.75
VFBGA54 [mm]
  round 0.4 smd: A1(0,0) A2(0.8,0) A3(1.6,0) A7(4.8,0) A8(5.6,0) A9(6.4,0) B1(0,-0.8) B2(0.8,-0.8) B3(1.6,-0.8) B7(4.8,-0.8) B8(5.6,-0.8) B9(6.4,-0.8) C1(0,-1.6) C2(0.8,-1.6) C3(1.6,-1.6) C7(4.8,-1.6) C8(5.6,-1.6) C9(6.4,-1.6) D1(0,-2.4) D2(0.8,-2.4) D3(1.6,-2.4) D7(4.8,-2.4) D8(5.6,-2.4) D9(6.4,-2.4) E1(0,-3.2) E2(0.8,-3.2) E3(1.6,-3.2) E7(4.8,-3.2) E8(5.6,-3.2) E9(6.4,-3.2) F1(0,-4) F2(0.8,-4) F3(1.6,-4) F7(4.8,-4) F8(5.6,-4) F9(6.4,-4) G1(0,-4.8) G2(0.8,-4.8) G3(1.6,-4.8) G7(4.8,-4.8) G8(5.6,-4.8) G9(6.4,-4.8) H1(0,-5.6) H2(0.8,-5.6) H3(1.6,-5.6) H7(4.8,-5.6) H8(5.6,-5.6) H9(6.4,-5.6) J1(0,-6.4) J2(0.8,-6.4) J3(1.6,-6.4) J7(4.8,-6.4) J8(5.6,-6.4) J9(6.4,-6.4)
  silkscreen extent -1.57,-10.2 7.2,3.8, body extent -0.8,-10.2 7.2,3.8, height 0.65
WIFI_MODULE [mm]
  oval 2x0.8 smd: 1(0,0) 2(0,-1) 3(0,-2) 4(0,-3) 5(0,-4) 6(0,-5) 7(0,-6) 8(0,-7) 9(0,-8) 10(0,-9) 11(0,-10) 12(0,-11) 13(0,-12) 14(0,-13) 15(0,-14) 16(0,-15) 28(13,-15) 29(13,-14) 30(13,-13) 31(13,-12) 32(13,-11) 33(13,-10) 34(13,-9) 35(13,-8) 36(13,-7) 37(13,-6) 38(13,-5) 39(13,-4) 40(13,-3) 41(13,-2) 42(13,-1) 43(13,0)
  oval 0.8x2 smd: 17(1.5,-16.5) 18(2.5,-16.5) 19(3.5,-16.5) 20(4.5,-16.5) 21(5.5,-16.5) 22(6.5,-16.5) 23(7.5,-16.5) 24(8.5,-16.5) 25(9.5,-16.5) 26(10.5,-16.5) 27(11.5,-16.5) 44(11.5,1.5) 45(10.5,1.5) 46(9.5,1.5) 47(8.5,1.5) 48(6.5,1.5) 49(4.5,1.5) 50(3.5,1.5) 51(2.5,1.5) 52(1.5,1.5)
  rect 0.7x1.2 smd: 53(4.849,-5.24) 54(8.153,-9.639) 55(4.849,-9.639) 56(8.153,-5.24)
  silkscreen extent -1.88,-14.49 11,0.21, body extent 0,-16.46 13,1.54, height 1.79
WSON8 [mm] "WSON, 8-Leads, Body 6,0x8,0mm (max), Pitch 1,27mm, IPC Medium Density"
  oval 0.95x0.6 smd: 1(0,0) 2(0,-1.27) 3(0,-2.54) 4(0,-3.81) 5(7.45,-3.81) 6(7.45,-2.54) 7(7.45,-1.27) 8(7.45,0)
  round 0.66 hole 0.33: 9(1.325,-3.105) 9(1.325,-1.905) 9(1.325,-0.705) 9(2.525,-3.105) 9(2.525,-1.905) 9(2.525,-0.705) 9(3.725,-3.105) 9(3.725,-1.905) 9(3.725,-0.705) 9(4.925,-3.105) 9(4.925,-1.905) 9(4.925,-0.705) 9(6.125,-3.105) 9(6.125,-1.905) 9(6.125,-0.705)
  rect 6.1x4.1 smd: 9(3.725,-1.905)
  silkscreen extent -1.15,-4.9 7.73,1.1, body extent -0.28,-4.9 7.73,1.1, height 0.8
XTAL_32.768kHz [mm] "XTAL"
  rect 1.3x1.9 smd: 1(0,0) 2(5.5,0) 3(5.5,3.2) 4(0,3.2)
  silkscreen extent -1.14,-1.9 6.65,4.48